# EAGLE board SparkFun_LTE_Stick_LARA_R6-Panel (EAGLE 9.6.2), part 1 of 4
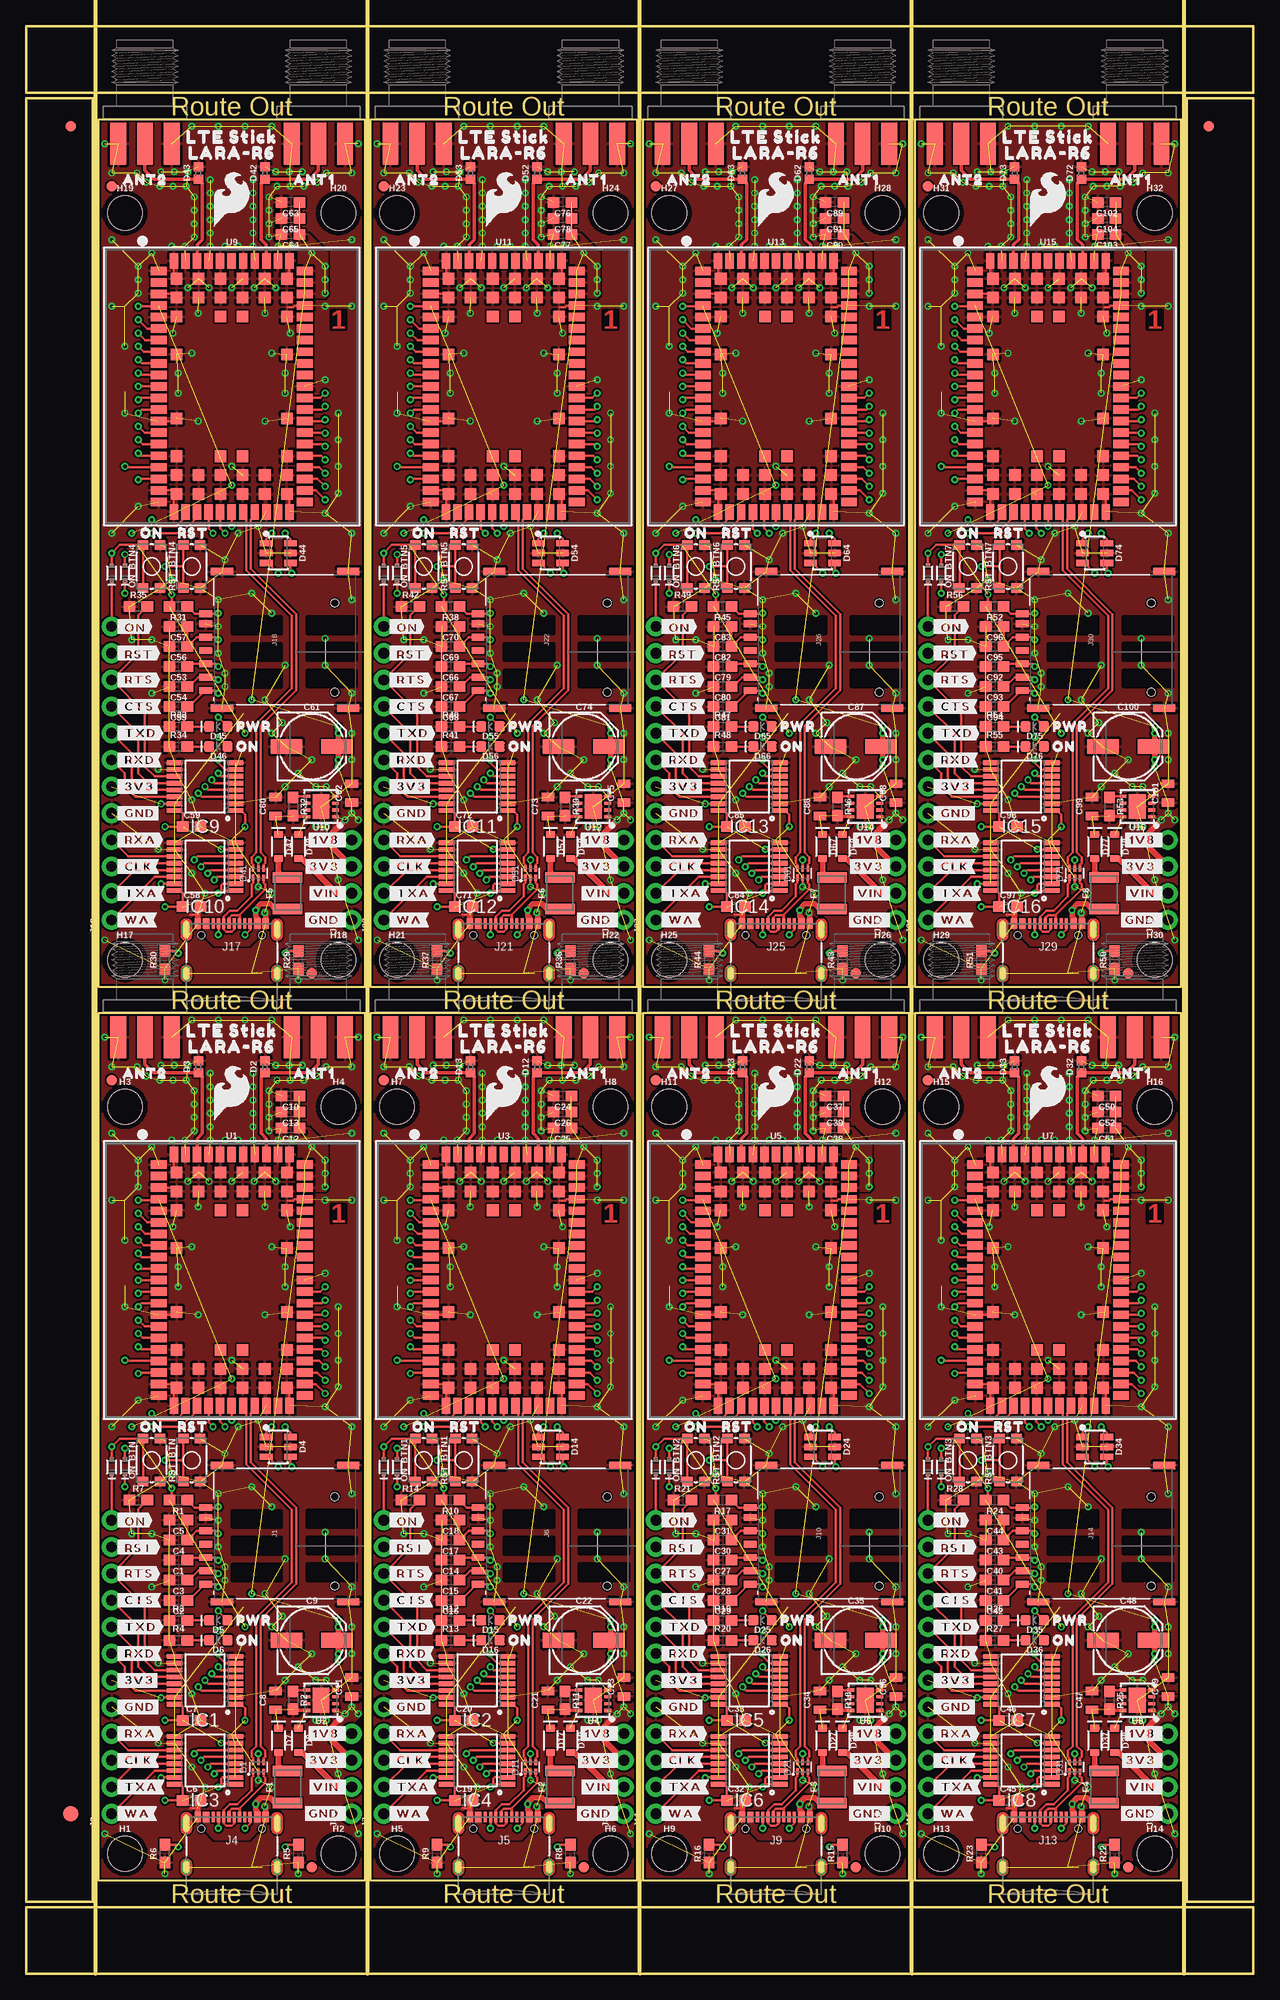
[diagram p0: board, top side]
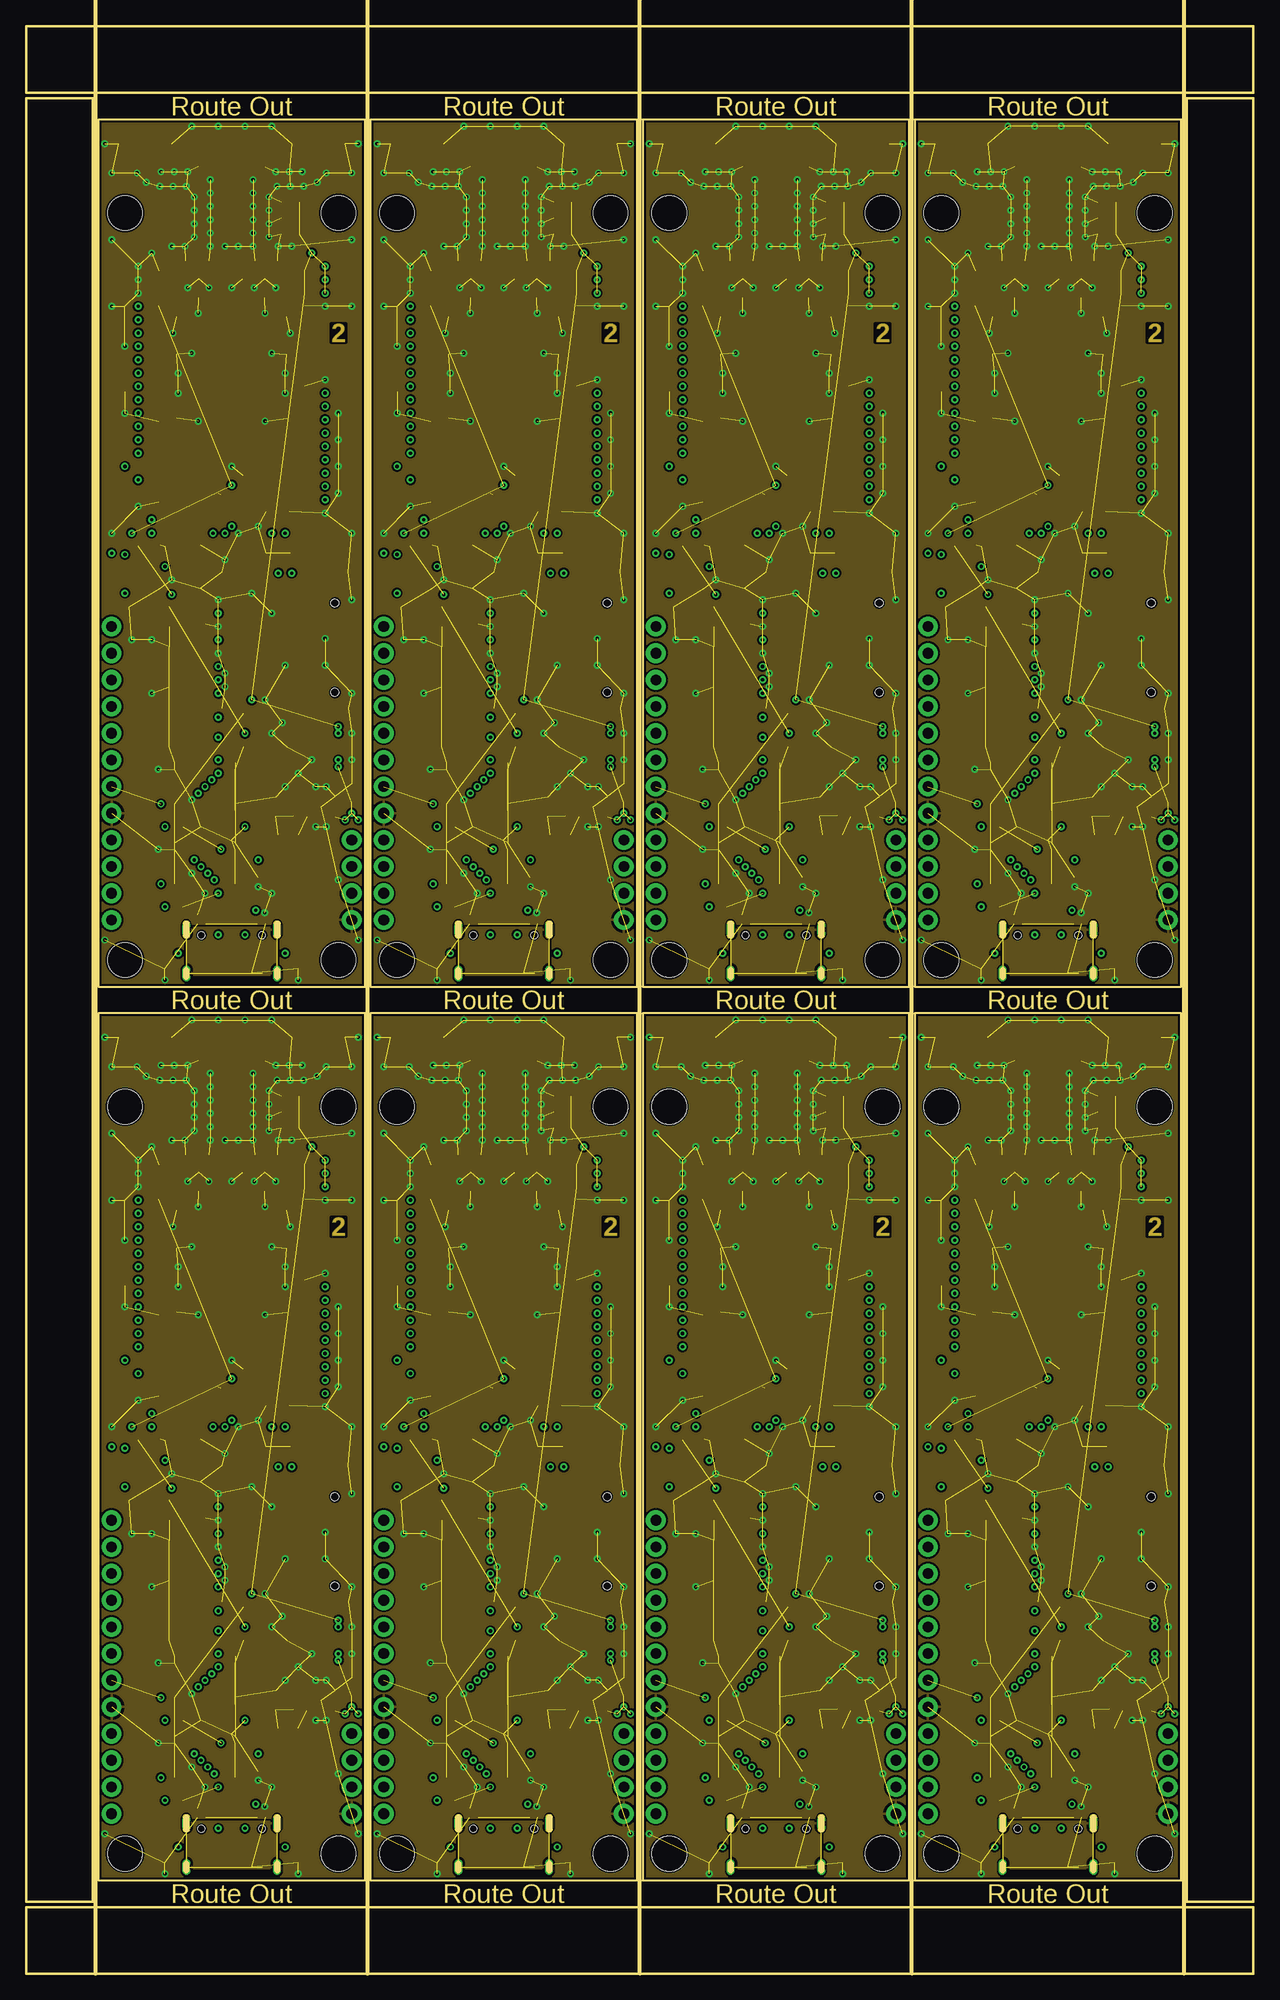
[diagram p1: board, inner layer Route2]
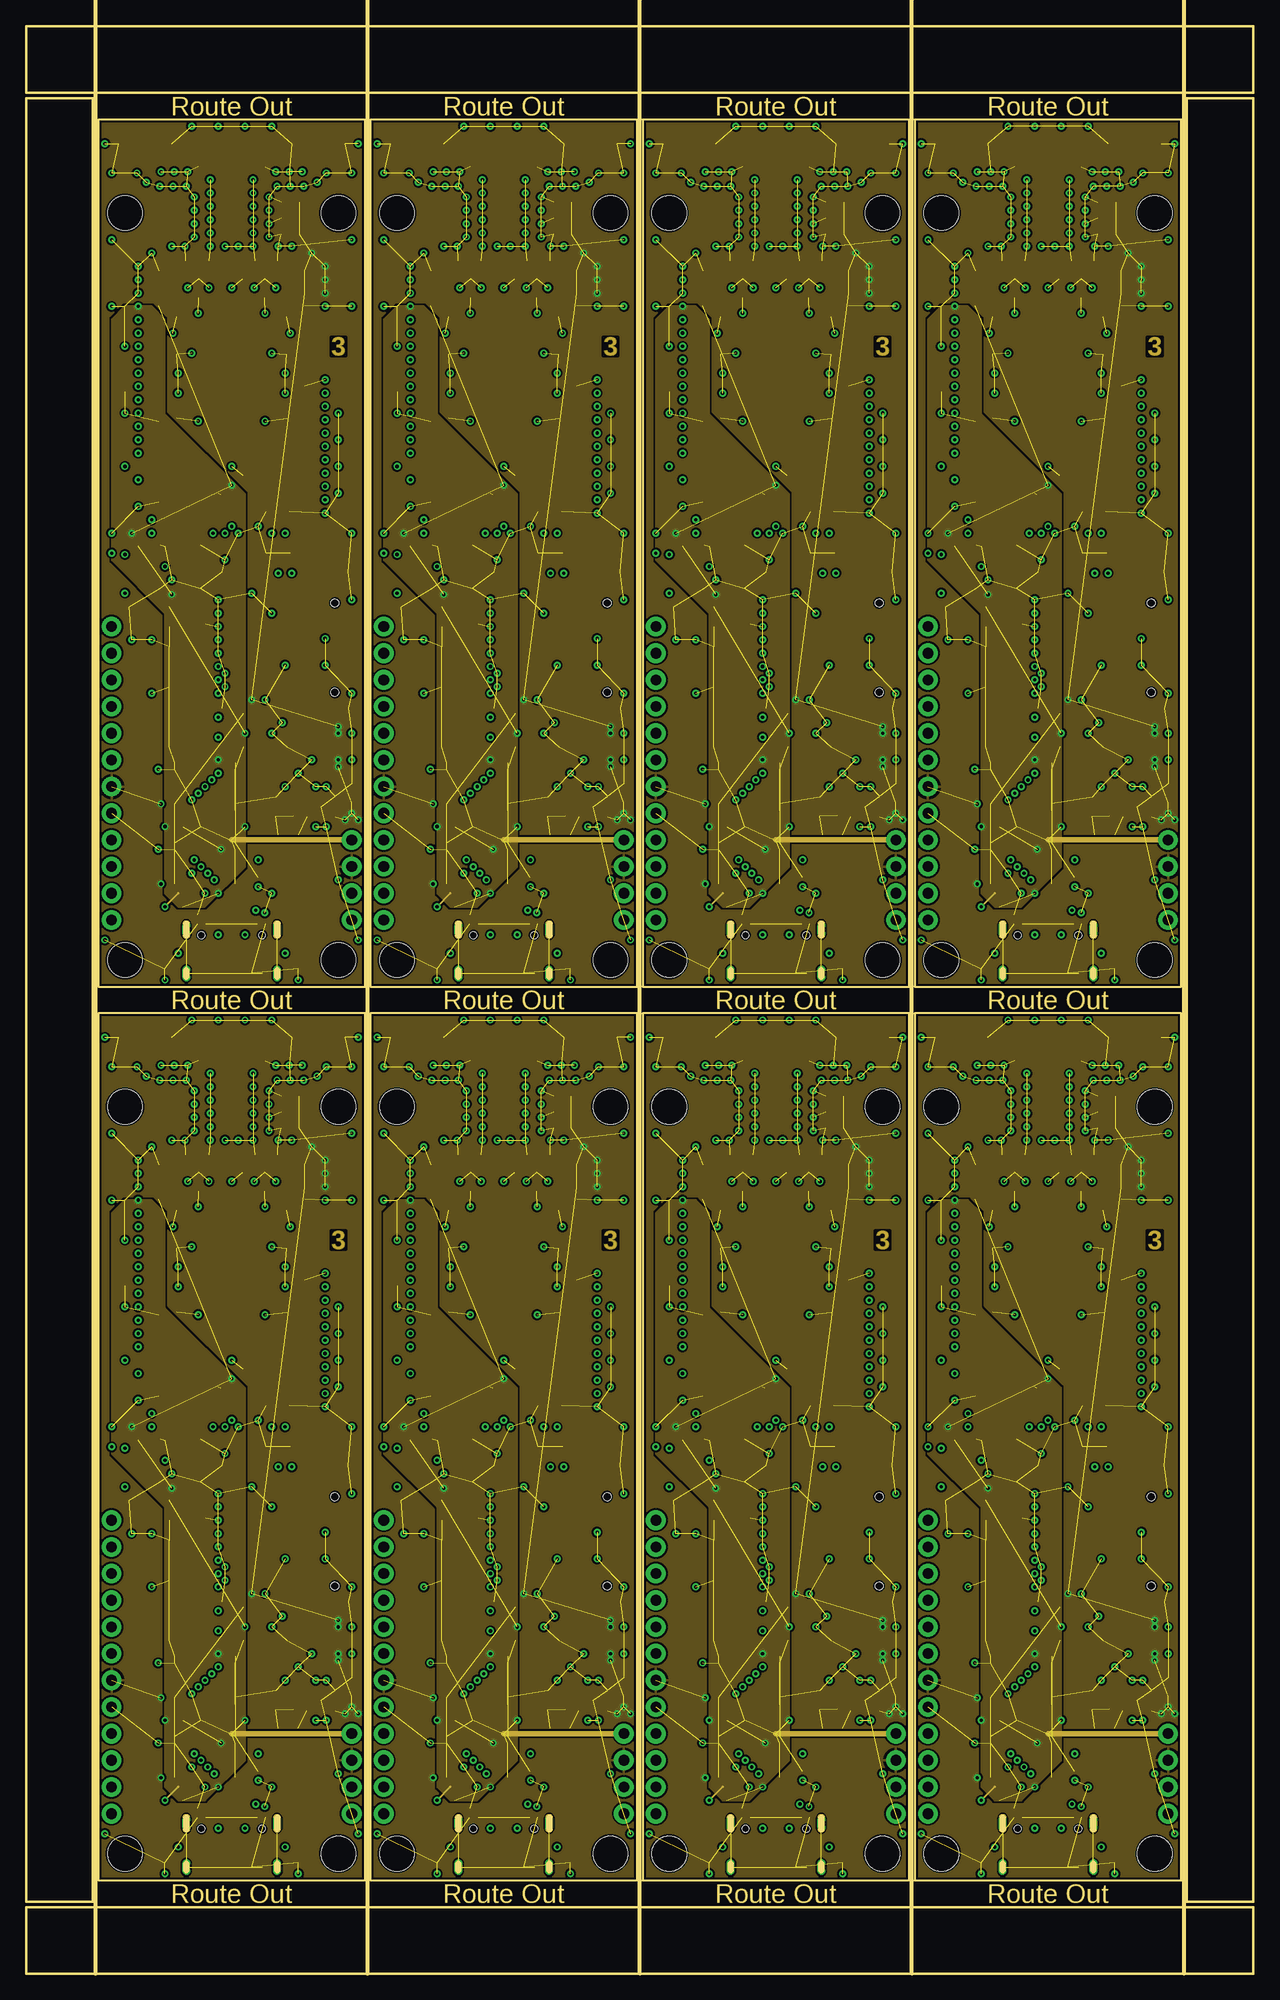
[diagram p2: board, inner layer Route15]
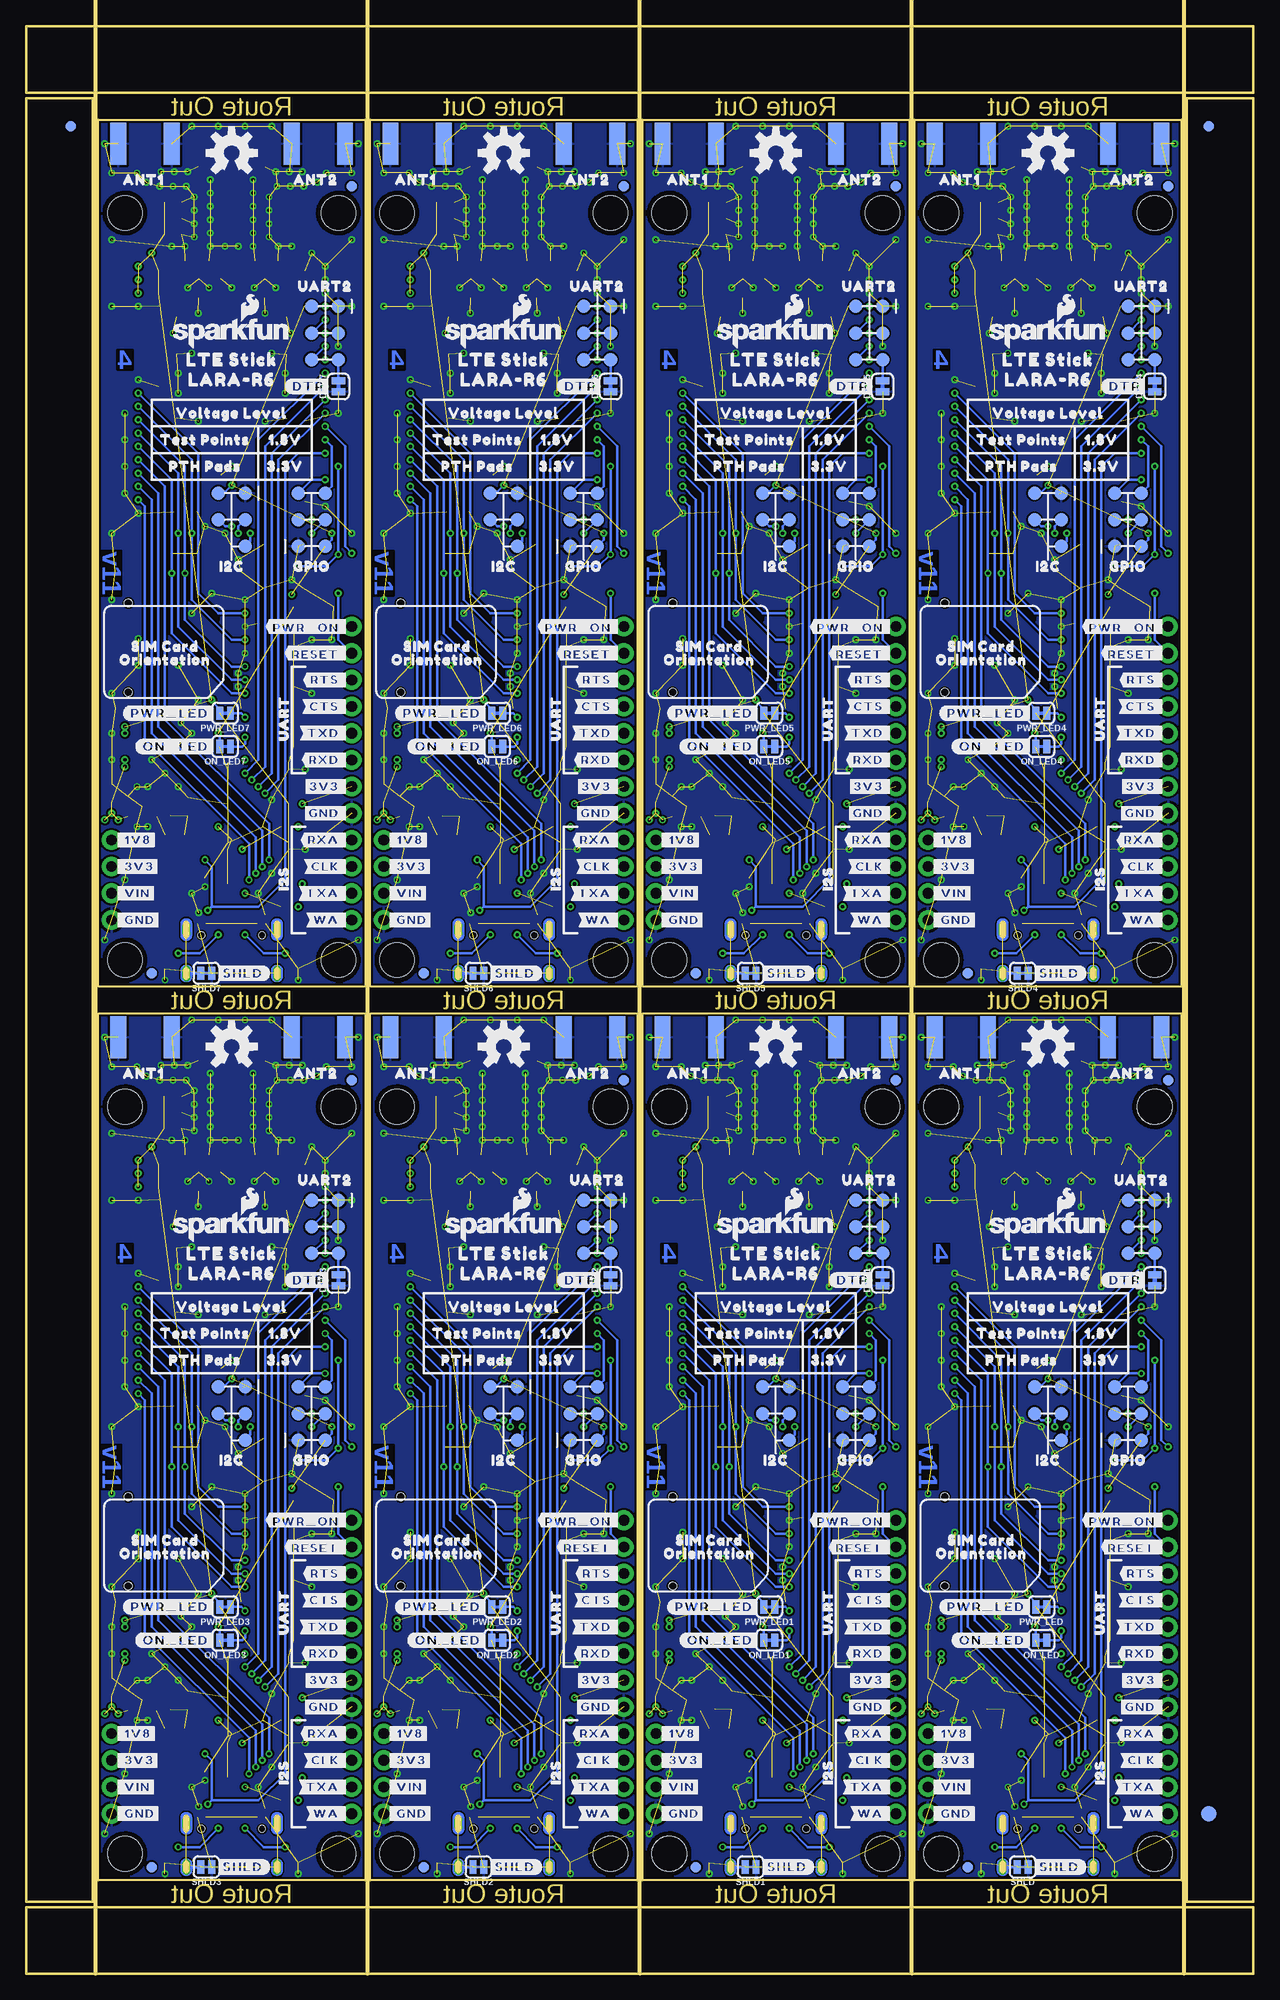
[diagram p3: board, bottom side, seen from below]

Size 116.84 x 185.42 mm. Coordinates in mm from the lower left corner, seen from the top.
Outline: 6.86,8.89 32.26,8.89 32.26,91.44 6.86,91.44 6.86,8.89
Outline: 32.77,8.89 58.17,8.89 58.17,91.44 32.77,91.44 32.77,8.89
Outline: 58.67,8.89 84.07,8.89 84.07,91.44 58.67,91.44 58.67,8.89
Outline: 84.58,8.89 109.98,8.89 109.98,91.44 84.58,91.44 84.58,8.89
Outline: 6.86,93.98 32.26,93.98 32.26,176.53 6.86,176.53 6.86,93.98
Outline: 32.77,93.98 58.17,93.98 58.17,176.53 32.77,176.53 32.77,93.98
Outline: 58.67,93.98 84.07,93.98 84.07,176.53 58.67,176.53 58.67,93.98
Outline: 84.58,93.98 109.98,93.98 109.98,176.53 84.58,176.53 84.58,93.98
Outline: 0,6.35 116.84,6.35 116.84,0 0,0 0,6.35
Outline: 110.49,178.56 116.84,178.56 116.84,6.86 110.49,6.86 110.49,178.56
Outline: 0,185.42 116.84,185.42 116.84,179.07 0,179.07 0,185.42
Outline: 0,178.56 6.35,178.56 6.35,6.86 0,6.86 0,178.56
Copper layers (1+2*15+16): Top 0.035559375mm / dielectric 0.47751875mm / Route2 0.035559375mm / dielectric 0.47751875mm / Route15 0.035559375mm / dielectric 0.47751875mm / Bottom 0.035559375mm
Design rules "SparkFun_LTE_Stick_LARA_R6": minimum track width 7mil, minimum drill 12mil, track to track 7mil, track to pad 7mil, pad to pad 7mil, via to via 7mil, smd to smd 7mil, copper to edge 7mil, drill to drill 7mil, minimum pad ring 7mil, minimum via ring 7mil, stop-mask expansion 3mil, vias tented up to drill 25mil, thermal gap 10mil
Net classes: 1 USB: width 0.239 mm, clearance 0.178 mm; 2 RF: width 0.312 mm, clearance 0.178 mm to class 0
tRestrict: area 14,32.5 to 14.1,32.9; area 14,22.2 to 14.4,22.4; area 14,29.8 to 14.4,30; area 39.9,32.5 to 40,32.9; area 39.9,22.2 to 40.3,22.4; area 39.9,29.8 to 40.3,30; area 65.8,32.5 to 65.9,32.9; area 65.8,22.2 to 66.2,22.4; area 65.8,29.8 to 66.2,30; area 91.7,32.5 to 91.8,32.9; area 91.7,22.2 to 92.1,22.4; area 91.7,29.8 to 92.1,30; 12 more areas
bRestrict: area 19.6,37.3 to 19.7,37.6; area 19.6,38.6 to 19.7,38.9; area 20.8,43.8 to 21,44.1; area 45.5,37.3 to 45.6,37.6; area 45.5,38.6 to 45.6,38.9; area 46.7,43.8 to 46.9,44.1; area 71.4,37.3 to 71.5,37.6; area 71.4,38.6 to 71.5,38.9; area 72.6,43.8 to 72.8,44.1; area 97.3,37.3 to 97.4,37.6; area 97.3,38.6 to 97.4,38.9; area 98.6,43.8 to 98.7,44.1; 12 more areas
Milling: 5 lines

## Footprints (pad centres in the part's own frame; a part is rotated, then mirrored left to right if it is on the bottom)
0603 = smd 1.1 x 1: 1 -0.85,0; 2 0.85,0
0805 = smd 0.8 x 1.2: 1 -0.9,0; 2 0.9,0
PANASONIC_D = smd 3 x 1.4: + 2.4,0; - -2.4,0
SOT886 = smd 0.61 x 0.25: 1 -0.405,0.5 | smd 0.56 x 0.25: 2 -0.43,0; 3 -0.43,-0.5; 4 0.43,-0.5; 5 0.43,0; 6 0.43,0.5
0402 = smd 0.85 x 0.9: 1 -0.58,0; 2 0.58,0
SOT23-6L = smd 0.6 x 1.2: 1 -0.95,-1.15; 2 0,-1.15; 3 0.95,-1.15; 4 0.95,1.15; 5 0,1.15; 6 -0.95,1.15
LED-0603 = smd 1 x 1: A -0.877,0; C 0.877,0
SOD-323 = smd 0.63 x 0.83: A 1.15,0; C -1.15,0
SOD-523 = smd 0.4 x 0.4: A -0.7,0; C 0.7,0
SMT-JUMPER_2_NC_TRACE_SILK = smd 0.66 x 1.27: 1 -0.521,0; 2 0.521,0
SMA-EDGE = smd 1.5 x 4: GND@0 -2.54,0; GND@1 2.54,0; SIG 0,0 | smd 1.5 x 4 bottom: GND@2 -2.54,0; GND@3 2.54,0
FIDUCIAL-1X2 = smd 1 x 1: 1 0,0
FIDUCIAL-1.5X3 = smd 1.5 x 1.5: 1 0,0
1210 = smd 1 x 2.8: 1 -1.5,0; 2 1.5,0
STAND-OFF = hole 3.302: 0,0
SOP65P640X120-16N = smd 1.5 x 0.45: 1 -2.9,2.275; 2 -2.9,1.625; 3 -2.9,0.975; 4 -2.9,0.325; 5 -2.9,-0.325; 6 -2.9,-0.975; 7 -2.9,-1.625; 8 -2.9,-2.275; 9 2.9,-2.275; 10 2.9,-1.625; 11 2.9,-0.975; 12 2.9,-0.325; 13 2.9,0.325; 14 2.9,0.975; 15 2.9,1.625; 16 2.9,2.275
NANO_SIM_PP = smd 0.7 x 2.1: A1 6.495,6; A2 -6.495,6; A3 -6.495,-6; A4 6.495,-6 | smd 0.65 x 1.23: C1 0.255,7.535; C2 -2.285,7.535; C3 -4.825,7.535; C5 1.525,7.535; C6 -1.015,7.535; C7 -3.555,7.535; CD 2.475,7.535 | hole 0.75: 3.505,-4.75; -4.995,-4.75
1X12_NO_SILK = drill 1.016 pad 1.88: 1 0,0; 2 2.54,0; 3 5.08,0; 4 7.62,0; 5 10.16,0; 6 12.7,0; 7 15.24,0; 8 17.78,0; 9 20.32,0; 10 22.86,0; 11 25.4,0; 12 27.94,0
1X04_NO_SILK = drill 1.016 pad 1.88: 1 0,0; 2 2.54,0; 3 5.08,0; 4 7.62,0
USB-C-16P_4LAYER-PADS = smd 0.3 x 1: A5 -1.25,-0.34; A6 -0.25,-0.34; A7 0.25,-0.34; A8 1.25,-0.34; B5 1.75,-0.34; B6 0.75,-0.34; B7 -0.75,-0.34; B8 -1.75,-0.34 | smd 0.6 x 1: GND -3.225,-0.34; GND2 3.225,-0.34; VBUS1 -2.45,-0.34; VBUS2 2.45,-0.34 | drill 0.4 pad 0.6 long: SHLD1 -4.318,-0.915; SHLD2 4.318,-0.915; SHLD3 -4.318,-5.095; SHLD4 4.318,-5.095 | hole 0.65: -2.89,-1.445; 2.89,-1.445
TACTILE_SWITCH_SMD_4.6X2.8MM = smd 0.9 x 1: 1 -2.05,-0.8; 2 2.05,-0.8; 3 2.05,0.8; 4 -2.05,0.8
PAD.03X.05 = smd 1.27 x 1.27: 1 0,0
LARA-LGA = smd 0.8 x 1.5: 1 -11,-6.95; 2 -9.9,-6.95; 3 -8.8,-6.95; 4 -7.7,-6.95; 5 -6.6,-6.95; 6 -5.5,-6.95; 7 -4.4,-6.95; 8 -3.3,-6.95; 9 -2.2,-6.95; 10 -1.1,-6.95; 11 0,-6.95; 12 1.1,-6.95; 13 2.2,-6.95; 14 3.3,-6.95; 15 4.4,-6.95; 16 5.5,-6.95; 17 6.6,-6.95; 18 7.7,-6.95; 19 8.8,-6.95; 20 9.9,-6.95; 21 11,-6.95; 33 11,6.95; 34 9.9,6.95; 35 8.8,6.95; 36 7.7,6.95; 37 6.6,6.95; 38 5.5,6.95; 39 4.4,6.95; 40 3.3,6.95; 41 2.2,6.95; 42 1.1,6.95; 43 0,6.95; 44 -1.1,6.95; 45 -2.2,6.95; 46 -3.3,6.95; 47 -4.4,6.95; 48 -5.5,6.95; 49 -6.6,6.95; 50 -7.7,6.95; 51 -8.8,6.95; 52 -9.9,6.95; 53 -11,6.95 | smd 1.5 x 0.8: 22 11.95,-5.5; 23 11.95,-4.4; 24 11.95,-3.3; 25 11.95,-2.2; 26 11.95,-1.1; 27 11.95,0; 28 11.95,1.1; 29 11.95,2.2; 30 11.95,3.3; 31 11.95,4.4; 32 11.95,5.5; 54 -11.95,5.5; 55 -11.95,4.4; 56 -11.95,3.3; 57 -11.95,2.2; 58 -11.95,1.1; 59 -11.95,0; 60 -11.95,-1.1; 61 -11.95,-2.2; 62 -11.95,-3.3; 63 -11.95,-4.4; 64 -11.95,-5.5 | smd 1.1 x 1.1: 65 -10.25,-5.25; 66 -10.25,-3.15; 67 -10.25,-1.05; 68 -10.25,1.05; 69 -10.25,3.15; 70 -10.25,5.25; 71 -8.45,-5.25; 72 -8.45,-3.15; 73 -8.45,-1.05; 74 -8.45,1.05; 75 -8.45,3.15; 76 -8.45,5.25; 77 -6.65,-5.25; 78 -6.65,5.25; 79 -3.05,-5.25; 80 -3.05,5.25; 81 3.05,-5.25; 82 3.05,5.25; 83 6.65,-5.25; 84 6.65,5.25; 85 8.45,-5.25; 86 8.45,-3.15; 87 8.45,-1.05; 88 8.45,1.05; 89 8.45,3.15; 90 8.45,5.25; 91 10.25,-5.25; 92 10.25,-3.15; 93 10.25,-1.05; 94 10.25,1.05; 95 10.25,3.15; 96 10.25,5.25; 97 -6.65,-1.05; 98 -6.65,1.05; 99 6.65,-1.05; 100 6.65,1.05
UDFN-8 = smd 0.3 x 0.65: 1 -0.975,-1.375; 2 -0.325,-1.375; 3 0.325,-1.375; 4 0.975,-1.375; 5 0.975,1.375; 6 0.325,1.375; 7 -0.325,1.375; 8 -0.975,1.375 | smd 2.35 x 1.6: EP 0,0

## Placement (x,y rotation side)
C1  47pF  [0603]  14.48,39.37 180 top
C2  47pF  [0603]  14.48,35.56 180 top
C3  47pF  [0603]  14.48,37.47 180 top
C4  47pF  [0603]  14.48,41.27 180 top
C5  0.1uF  [0603]  14.48,43.18 180 top
C6  0.1uF  [0603]  15.75,16.51 0 top
C7  0.1uF  [0603]  15.75,24.13 0 top
C8  10uF  [0805]  23.75,26.04 90 top
C9  100uF  [PANASONIC_D]  27.18,31.75 0 top
C10  0.1uF  [0603]  25.15,83.57 180 top
C11  10uF  [0805]  30.99,27.3 90 top
C12  15pF  [0603]  25.15,80.52 180 top
C13  68pF  [0603]  25.15,82.04 180 top
C14  47pF  [0603]  40.39,39.37 180 top
C15  47pF  [0603]  40.39,37.47 180 top
C16  47pF  [0603]  40.39,35.56 180 top
C17  47pF  [0603]  40.39,41.27 180 top
C18  0.1uF  [0603]  40.39,43.18 180 top
C19  0.1uF  [0603]  41.66,16.51 0 top
C20  0.1uF  [0603]  41.66,24.13 0 top
C21  10uF  [0805]  49.66,26.04 90 top
C22  100uF  [PANASONIC_D]  53.09,31.75 0 top
C23  10uF  [0805]  56.9,27.3 90 top
C24  0.1uF  [0603]  51.05,83.57 180 top
C25  15pF  [0603]  51.05,80.52 180 top
C26  68pF  [0603]  51.05,82.04 180 top
C27  47pF  [0603]  66.29,39.37 180 top
C28  47pF  [0603]  66.29,37.47 180 top
C29  47pF  [0603]  66.29,35.56 180 top
C30  47pF  [0603]  66.29,41.27 180 top
C31  0.1uF  [0603]  66.29,43.18 180 top
C32  0.1uF  [0603]  67.56,16.51 0 top
C33  0.1uF  [0603]  67.56,24.13 0 top
C34  10uF  [0805]  75.56,26.04 90 top
C35  100uF  [PANASONIC_D]  78.99,31.75 0 top
C36  10uF  [0805]  82.8,27.3 90 top
C37  0.1uF  [0603]  76.96,83.57 180 top
C38  15pF  [0603]  76.96,80.52 180 top
C39  68pF  [0603]  76.96,82.04 180 top
C40  47pF  [0603]  92.2,39.37 180 top
C41  47pF  [0603]  92.2,37.47 180 top
C42  47pF  [0603]  92.2,35.56 180 top
C43  47pF  [0603]  92.2,41.27 180 top
C44  0.1uF  [0603]  92.2,43.18 180 top
C45  0.1uF  [0603]  93.47,16.51 0 top
C46  0.1uF  [0603]  93.47,24.13 0 top
C47  10uF  [0805]  101.47,26.04 90 top
C48  100uF  [PANASONIC_D]  104.9,31.75 0 top
C49  10uF  [0805]  108.71,27.3 90 top
C50  0.1uF  [0603]  102.87,83.57 180 top
C51  15pF  [0603]  102.87,80.52 180 top
C52  68pF  [0603]  102.87,82.04 180 top
C53  47pF  [0603]  14.48,124.46 180 top
C54  47pF  [0603]  14.48,122.56 180 top
C55  47pF  [0603]  14.48,120.65 180 top
C56  47pF  [0603]  14.48,126.36 180 top
C57  0.1uF  [0603]  14.48,128.27 180 top
C58  0.1uF  [0603]  15.75,101.6 0 top
C59  0.1uF  [0603]  15.75,109.22 0 top
C60  10uF  [0805]  23.75,111.12 90 top
C61  100uF  [PANASONIC_D]  27.18,116.84 0 top
C62  10uF  [0805]  30.99,112.39 90 top
C63  0.1uF  [0603]  25.15,168.66 180 top
C64  15pF  [0603]  25.15,165.61 180 top
C65  68pF  [0603]  25.15,167.13 180 top
C66  47pF  [0603]  40.39,124.46 180 top
C67  47pF  [0603]  40.39,122.56 180 top
C68  47pF  [0603]  40.39,120.65 180 top
C69  47pF  [0603]  40.39,126.36 180 top
C70  0.1uF  [0603]  40.39,128.27 180 top
C71  0.1uF  [0603]  41.66,101.6 0 top
C72  0.1uF  [0603]  41.66,109.22 0 top
C73  10uF  [0805]  49.66,111.12 90 top
C74  100uF  [PANASONIC_D]  53.09,116.84 0 top
C75  10uF  [0805]  56.9,112.39 90 top
C76  0.1uF  [0603]  51.05,168.66 180 top
C77  15pF  [0603]  51.05,165.61 180 top
C78  68pF  [0603]  51.05,167.13 180 top
C79  47pF  [0603]  66.29,124.46 180 top
C80  47pF  [0603]  66.29,122.56 180 top
C81  47pF  [0603]  66.29,120.65 180 top
C82  47pF  [0603]  66.29,126.36 180 top
C83  0.1uF  [0603]  66.29,128.27 180 top
C84  0.1uF  [0603]  67.56,101.6 0 top
C85  0.1uF  [0603]  67.56,109.22 0 top
C86  10uF  [0805]  75.56,111.12 90 top
C87  100uF  [PANASONIC_D]  78.99,116.84 0 top
C88  10uF  [0805]  82.8,112.39 90 top
C89  0.1uF  [0603]  76.96,168.66 180 top
C90  15pF  [0603]  76.96,165.61 180 top
C91  68pF  [0603]  76.96,167.13 180 top
C92  47pF  [0603]  92.2,124.46 180 top
C93  47pF  [0603]  92.2,122.56 180 top
C94  47pF  [0603]  92.2,120.65 180 top
C95  47pF  [0603]  92.2,126.36 180 top
C96  0.1uF  [0603]  92.2,128.27 180 top
C97  0.1uF  [0603]  93.47,101.6 0 top
C98  0.1uF  [0603]  93.47,109.22 0 top
C99  10uF  [0805]  101.47,111.12 90 top
C100  100uF  [PANASONIC_D]  104.9,116.84 0 top
C101  10uF  [0805]  108.71,112.39 90 top
C102  0.1uF  [0603]  102.87,168.66 180 top
C103  15pF  [0603]  102.87,165.61 180 top
C104  68pF  [0603]  102.87,167.13 180 top
D1  PRTR5V0U2F  [SOT886]  22.1,19.69 90 top
D2  PESD0402-0402  [0402]  22.73,86.36 90 top
D3  PESD0402-0402  [0402]  16.38,86.36 90 top
D4  DT1042-04SO-7  [SOT23-6L]  24,50.16 270 top
D5  Red  [LED-0603]  18.29,33.66 180 top
D6  Red  [LED-0603]  18.29,31.75 180 top
D7  3A/10V/280mV  [SOD-323]  24,22.23 270 top
D8  3A/10V/280mV  [SOD-323]  25.91,22.23 270 top
D9  120mA/40V/370mV  [SOD-523]  8.13,48.26 270 top
D10  120mA/40V/370mV  [SOD-523]  9.4,48.26 270 top
D11  PRTR5V0U2F  [SOT886]  48.01,19.69 90 top
D12  PESD0402-0402  [0402]  48.64,86.36 90 top
D13  PESD0402-0402  [0402]  42.29,86.36 90 top
D14  DT1042-04SO-7  [SOT23-6L]  49.91,50.16 270 top
D15  Red  [LED-0603]  44.2,33.66 180 top
D16  Red  [LED-0603]  44.2,31.75 180 top
D17  3A/10V/280mV  [SOD-323]  49.91,22.23 270 top
D18  3A/10V/280mV  [SOD-323]  51.82,22.23 270 top
D19  120mA/40V/370mV  [SOD-523]  34.04,48.26 270 top
D20  120mA/40V/370mV  [SOD-523]  35.31,48.26 270 top
D21  PRTR5V0U2F  [SOT886]  73.91,19.69 90 top
D22  PESD0402-0402  [0402]  74.55,86.36 90 top
D23  PESD0402-0402  [0402]  68.2,86.36 90 top
D24  DT1042-04SO-7  [SOT23-6L]  75.82,50.16 270 top
D25  Red  [LED-0603]  70.1,33.66 180 top
D26  Red  [LED-0603]  70.1,31.75 180 top
D27  3A/10V/280mV  [SOD-323]  75.82,22.23 270 top
D28  3A/10V/280mV  [SOD-323]  77.72,22.23 270 top
D29  120mA/40V/370mV  [SOD-523]  59.94,48.26 270 top
D30  120mA/40V/370mV  [SOD-523]  61.21,48.26 270 top
D31  PRTR5V0U2F  [SOT886]  99.82,19.69 90 top
D32  PESD0402-0402  [0402]  100.46,86.36 90 top
D33  PESD0402-0402  [0402]  94.11,86.36 90 top
D34  DT1042-04SO-7  [SOT23-6L]  101.73,50.16 270 top
D35  Red  [LED-0603]  96.01,33.66 180 top
D36  Red  [LED-0603]  96.01,31.75 180 top
D37  3A/10V/280mV  [SOD-323]  101.73,22.23 270 top
D38  3A/10V/280mV  [SOD-323]  103.63,22.23 270 top
D39  120mA/40V/370mV  [SOD-523]  85.85,48.26 270 top
D40  120mA/40V/370mV  [SOD-523]  87.12,48.26 270 top
D41  PRTR5V0U2F  [SOT886]  22.1,104.78 90 top
D42  PESD0402-0402  [0402]  22.73,171.45 90 top
D43  PESD0402-0402  [0402]  16.38,171.45 90 top
D44  DT1042-04SO-7  [SOT23-6L]  24,135.25 270 top
D45  Red  [LED-0603]  18.29,118.75 180 top
D46  Red  [LED-0603]  18.29,116.84 180 top
D47  3A/10V/280mV  [SOD-323]  24,107.31 270 top
D48  3A/10V/280mV  [SOD-323]  25.91,107.31 270 top
D49  120mA/40V/370mV  [SOD-523]  8.13,133.35 270 top
D50  120mA/40V/370mV  [SOD-523]  9.4,133.35 270 top
D51  PRTR5V0U2F  [SOT886]  48.01,104.78 90 top
D52  PESD0402-0402  [0402]  48.64,171.45 90 top
D53  PESD0402-0402  [0402]  42.29,171.45 90 top
D54  DT1042-04SO-7  [SOT23-6L]  49.91,135.25 270 top
D55  Red  [LED-0603]  44.2,118.75 180 top
D56  Red  [LED-0603]  44.2,116.84 180 top
D57  3A/10V/280mV  [SOD-323]  49.91,107.31 270 top
D58  3A/10V/280mV  [SOD-323]  51.82,107.31 270 top
D59  120mA/40V/370mV  [SOD-523]  34.04,133.35 270 top
D60  120mA/40V/370mV  [SOD-523]  35.31,133.35 270 top
D61  PRTR5V0U2F  [SOT886]  73.91,104.78 90 top
D62  PESD0402-0402  [0402]  74.55,171.45 90 top
D63  PESD0402-0402  [0402]  68.2,171.45 90 top
D64  DT1042-04SO-7  [SOT23-6L]  75.82,135.25 270 top
D65  Red  [LED-0603]  70.1,118.75 180 top
D66  Red  [LED-0603]  70.1,116.84 180 top
D67  3A/10V/280mV  [SOD-323]  75.82,107.31 270 top
D68  3A/10V/280mV  [SOD-323]  77.72,107.31 270 top
D69  120mA/40V/370mV  [SOD-523]  59.94,133.35 270 top
D70  120mA/40V/370mV  [SOD-523]  61.21,133.35 270 top
D71  PRTR5V0U2F  [SOT886]  99.82,104.78 90 top
D72  PESD0402-0402  [0402]  100.46,171.45 90 top
D73  PESD0402-0402  [0402]  94.11,171.45 90 top
D74  DT1042-04SO-7  [SOT23-6L]  101.73,135.25 270 top
D75  Red  [LED-0603]  96.01,118.75 180 top
D76  Red  [LED-0603]  96.01,116.84 180 top
D77  3A/10V/280mV  [SOD-323]  101.73,107.31 270 top
D78  3A/10V/280mV  [SOD-323]  103.63,107.31 270 top
D79  120mA/40V/370mV  [SOD-523]  85.85,133.35 270 top
D80  120mA/40V/370mV  [SOD-523]  87.12,133.35 270 top
DTR  JUMPER-SMT_2_NC_TRACE_SILK  [SMT-JUMPER_2_NC_TRACE_SILK]  9.4,66.04 90 bottom
DTR1  JUMPER-SMT_2_NC_TRACE_SILK  [SMT-JUMPER_2_NC_TRACE_SILK]  35.31,66.04 90 bottom
DTR2  JUMPER-SMT_2_NC_TRACE_SILK  [SMT-JUMPER_2_NC_TRACE_SILK]  61.21,66.04 90 bottom
DTR3  JUMPER-SMT_2_NC_TRACE_SILK  [SMT-JUMPER_2_NC_TRACE_SILK]  87.12,66.04 90 bottom
DTR4  JUMPER-SMT_2_NC_TRACE_SILK  [SMT-JUMPER_2_NC_TRACE_SILK]  9.4,151.13 90 bottom
DTR5  JUMPER-SMT_2_NC_TRACE_SILK  [SMT-JUMPER_2_NC_TRACE_SILK]  35.31,151.13 90 bottom
DTR6  JUMPER-SMT_2_NC_TRACE_SILK  [SMT-JUMPER_2_NC_TRACE_SILK]  61.21,151.13 90 bottom
DTR7  JUMPER-SMT_2_NC_TRACE_SILK  [SMT-JUMPER_2_NC_TRACE_SILK]  87.12,151.13 90 bottom
E1  ANTENNA-SMA-GROUNDEDEDGE_SMA  [SMA-EDGE]  11.3,89.15 0 top
E2  ANTENNA-SMA-GROUNDEDEDGE_SMA  [SMA-EDGE]  27.81,89.15 0 top
E3  ANTENNA-SMA-GROUNDEDEDGE_SMA  [SMA-EDGE]  37.21,89.15 0 top
E4  ANTENNA-SMA-GROUNDEDEDGE_SMA  [SMA-EDGE]  53.72,89.15 0 top
E5  ANTENNA-SMA-GROUNDEDEDGE_SMA  [SMA-EDGE]  63.12,89.15 0 top
E6  ANTENNA-SMA-GROUNDEDEDGE_SMA  [SMA-EDGE]  79.63,89.15 0 top
E7  ANTENNA-SMA-GROUNDEDEDGE_SMA  [SMA-EDGE]  89.03,89.15 0 top
E8  ANTENNA-SMA-GROUNDEDEDGE_SMA  [SMA-EDGE]  105.54,89.15 0 top
E9  ANTENNA-SMA-GROUNDEDEDGE_SMA  [SMA-EDGE]  11.3,174.24 0 top
E10  ANTENNA-SMA-GROUNDEDEDGE_SMA  [SMA-EDGE]  27.81,174.24 0 top
E11  ANTENNA-SMA-GROUNDEDEDGE_SMA  [SMA-EDGE]  37.21,174.24 0 top
E12  ANTENNA-SMA-GROUNDEDEDGE_SMA  [SMA-EDGE]  53.72,174.24 0 top
E13  ANTENNA-SMA-GROUNDEDEDGE_SMA  [SMA-EDGE]  63.12,174.24 0 top
E14  ANTENNA-SMA-GROUNDEDEDGE_SMA  [SMA-EDGE]  79.63,174.24 0 top
E15  ANTENNA-SMA-GROUNDEDEDGE_SMA  [SMA-EDGE]  89.03,174.24 0 top
E16  ANTENNA-SMA-GROUNDEDEDGE_SMA  [SMA-EDGE]  105.54,174.24 0 top
E$1  [FIDUCIAL-1X2]  4.23,175.89 0 top
E$2  [FIDUCIAL-1X2]  4.23,175.89 0 bottom
E$3  [FIDUCIAL-1X2]  112.61,175.89 0 top
E$4  [FIDUCIAL-1X2]  112.61,175.89 0 bottom
E$5  [FIDUCIAL-1.5X3]  4.23,15.24 0 top
E$6  [FIDUCIAL-1.5X3]  4.23,15.24 0 bottom
F1  6V/2A  [1210]  24.89,17.78 90 top
F2  6V/2A  [1210]  50.8,17.78 90 top
F3  6V/2A  [1210]  76.71,17.78 90 top
F4  6V/2A  [1210]  102.62,17.78 90 top
F5  6V/2A  [1210]  24.89,102.87 90 top
F6  6V/2A  [1210]  50.8,102.87 90 top
F7  6V/2A  [1210]  76.71,102.87 90 top
F8  6V/2A  [1210]  102.62,102.87 90 top
FD1  FIDUCIAL1X2  [FIDUCIAL-1X2]  8.13,85.09 0 top
FD2  FIDUCIAL1X2  [FIDUCIAL-1X2]  8.13,85.09 0 bottom
FD3  FIDUCIAL1X2  [FIDUCIAL-1X2]  27.18,10.16 0 top
FD4  FIDUCIAL1X2  [FIDUCIAL-1X2]  27.18,10.16 0 bottom
FD5  FIDUCIAL1X2  [FIDUCIAL-1X2]  34.04,85.09 0 top
FD6  FIDUCIAL1X2  [FIDUCIAL-1X2]  34.04,85.09 0 bottom
FD7  FIDUCIAL1X2  [FIDUCIAL-1X2]  53.09,10.16 0 top
FD8  FIDUCIAL1X2  [FIDUCIAL-1X2]  53.09,10.16 0 bottom
FD9  FIDUCIAL1X2  [FIDUCIAL-1X2]  59.94,85.09 0 top
FD10  FIDUCIAL1X2  [FIDUCIAL-1X2]  59.94,85.09 0 bottom
FD11  FIDUCIAL1X2  [FIDUCIAL-1X2]  78.99,10.16 0 top
FD12  FIDUCIAL1X2  [FIDUCIAL-1X2]  78.99,10.16 0 bottom
FD13  FIDUCIAL1X2  [FIDUCIAL-1X2]  85.85,85.09 0 top
FD14  FIDUCIAL1X2  [FIDUCIAL-1X2]  85.85,85.09 0 bottom
FD15  FIDUCIAL1X2  [FIDUCIAL-1X2]  104.9,10.16 0 top
FD16  FIDUCIAL1X2  [FIDUCIAL-1X2]  104.9,10.16 0 bottom
FD17  FIDUCIAL1X2  [FIDUCIAL-1X2]  8.13,170.18 0 top
FD18  FIDUCIAL1X2  [FIDUCIAL-1X2]  8.13,170.18 0 bottom
FD19  FIDUCIAL1X2  [FIDUCIAL-1X2]  27.18,95.25 0 top
FD20  FIDUCIAL1X2  [FIDUCIAL-1X2]  27.18,95.25 0 bottom
FD21  FIDUCIAL1X2  [FIDUCIAL-1X2]  34.04,170.18 0 top
FD22  FIDUCIAL1X2  [FIDUCIAL-1X2]  34.04,170.18 0 bottom
FD23  FIDUCIAL1X2  [FIDUCIAL-1X2]  53.09,95.25 0 top
FD24  FIDUCIAL1X2  [FIDUCIAL-1X2]  53.09,95.25 0 bottom
FD25  FIDUCIAL1X2  [FIDUCIAL-1X2]  59.94,170.18 0 top
FD26  FIDUCIAL1X2  [FIDUCIAL-1X2]  59.94,170.18 0 bottom
FD27  FIDUCIAL1X2  [FIDUCIAL-1X2]  78.99,95.25 0 top
FD28  FIDUCIAL1X2  [FIDUCIAL-1X2]  78.99,95.25 0 bottom
FD29  FIDUCIAL1X2  [FIDUCIAL-1X2]  85.85,170.18 0 top
FD30  FIDUCIAL1X2  [FIDUCIAL-1X2]  85.85,170.18 0 bottom
FD31  FIDUCIAL1X2  [FIDUCIAL-1X2]  104.9,95.25 0 top
FD32  FIDUCIAL1X2  [FIDUCIAL-1X2]  104.9,95.25 0 bottom
H1  STAND-OFF  [STAND-OFF]  9.4,11.43 0 top
H2  STAND-OFF  [STAND-OFF]  29.72,11.43 0 top
H3  STAND-OFF  [STAND-OFF]  9.4,82.55 0 top
H4  STAND-OFF  [STAND-OFF]  29.72,82.55 0 top
H5  STAND-OFF  [STAND-OFF]  35.31,11.43 0 top
H6  STAND-OFF  [STAND-OFF]  55.63,11.43 0 top
H7  STAND-OFF  [STAND-OFF]  35.31,82.55 0 top
H8  STAND-OFF  [STAND-OFF]  55.63,82.55 0 top
H9  STAND-OFF  [STAND-OFF]  61.21,11.43 0 top
H10  STAND-OFF  [STAND-OFF]  81.53,11.43 0 top
H11  STAND-OFF  [STAND-OFF]  61.21,82.55 0 top
H12  STAND-OFF  [STAND-OFF]  81.53,82.55 0 top
H13  STAND-OFF  [STAND-OFF]  87.12,11.43 0 top
H14  STAND-OFF  [STAND-OFF]  107.44,11.43 0 top
H15  STAND-OFF  [STAND-OFF]  87.12,82.55 0 top
H16  STAND-OFF  [STAND-OFF]  107.44,82.55 0 top
H17  STAND-OFF  [STAND-OFF]  9.4,96.52 0 top
H18  STAND-OFF  [STAND-OFF]  29.72,96.52 0 top
H19  STAND-OFF  [STAND-OFF]  9.4,167.64 0 top
H20  STAND-OFF  [STAND-OFF]  29.72,167.64 0 top
H21  STAND-OFF  [STAND-OFF]  35.31,96.52 0 top
H22  STAND-OFF  [STAND-OFF]  55.63,96.52 0 top
H23  STAND-OFF  [STAND-OFF]  35.31,167.64 0 top
H24  STAND-OFF  [STAND-OFF]  55.63,167.64 0 top
H25  STAND-OFF  [STAND-OFF]  61.21,96.52 0 top
H26  STAND-OFF  [STAND-OFF]  81.53,96.52 0 top
H27  STAND-OFF  [STAND-OFF]  61.21,167.64 0 top
H28  STAND-OFF  [STAND-OFF]  81.53,167.64 0 top
H29  STAND-OFF  [STAND-OFF]  87.12,96.52 0 top
H30  STAND-OFF  [STAND-OFF]  107.44,96.52 0 top
H31  STAND-OFF  [STAND-OFF]  87.12,167.64 0 top
H32  STAND-OFF  [STAND-OFF]  107.44,167.64 0 top
IC1  SN74AVC4T774PW  [SOP65P640X120-16N]  17.02,27.94 180 top
IC2  SN74AVC4T774PW  [SOP65P640X120-16N]  42.93,27.94 180 top
IC3  SN74AVC4T774PW  [SOP65P640X120-16N]  17.02,20.32 180 top
IC4  SN74AVC4T774PW  [SOP65P640X120-16N]  42.93,20.32 180 top
IC5  SN74AVC4T774PW  [SOP65P640X120-16N]  68.83,27.94 180 top
IC6  SN74AVC4T774PW  [SOP65P640X120-16N]  68.83,20.32 180 top
IC7  SN74AVC4T774PW  [SOP65P640X120-16N]  94.74,27.94 180 top
IC8  SN74AVC4T774PW  [SOP65P640X120-16N]  94.74,20.32 180 top
IC9  SN74AVC4T774PW  [SOP65P640X120-16N]  17.02,113.03 180 top
IC10  SN74AVC4T774PW  [SOP65P640X120-16N]  17.02,105.41 180 top
IC11  SN74AVC4T774PW  [SOP65P640X120-16N]  42.93,113.03 180 top
IC12  SN74AVC4T774PW  [SOP65P640X120-16N]  42.93,105.41 180 top
IC13  SN74AVC4T774PW  [SOP65P640X120-16N]  68.83,113.03 180 top
IC14  SN74AVC4T774PW  [SOP65P640X120-16N]  68.83,105.41 180 top
IC15  SN74AVC4T774PW  [SOP65P640X120-16N]  94.74,113.03 180 top
IC16  SN74AVC4T774PW  [SOP65P640X120-16N]  94.74,105.41 180 top
J1  NANO_SIM  [NANO_SIM_PP]  24.64,41.91 90 top
J2  [1X12_NO_SILK]  8.13,15.24 90 top
J3  [1X04_NO_SILK]  30.99,15.24 90 top
J4  [USB-C-16P_4LAYER-PADS]  19.56,15.24 0 top
J5  [USB-C-16P_4LAYER-PADS]  45.47,15.24 0 top
J6  NANO_SIM  [NANO_SIM_PP]  50.55,41.91 90 top
J7  [1X12_NO_SILK]  34.04,15.24 90 top
J8  [1X04_NO_SILK]  56.9,15.24 90 top
J9  [USB-C-16P_4LAYER-PADS]  71.37,15.24 0 top
J10  NANO_SIM  [NANO_SIM_PP]  76.45,41.91 90 top
J11  [1X12_NO_SILK]  59.94,15.24 90 top
J12  [1X04_NO_SILK]  82.8,15.24 90 top
J13  [USB-C-16P_4LAYER-PADS]  97.28,15.24 0 top
J14  NANO_SIM  [NANO_SIM_PP]  102.36,41.91 90 top
J15  [1X12_NO_SILK]  85.85,15.24 90 top
J16  [1X04_NO_SILK]  108.71,15.24 90 top
J17  [USB-C-16P_4LAYER-PADS]  19.56,100.33 0 top
J18  NANO_SIM  [NANO_SIM_PP]  24.64,127 90 top
J19  [1X12_NO_SILK]  8.13,100.33 90 top
J20  [1X04_NO_SILK]  30.99,100.33 90 top
J21  [USB-C-16P_4LAYER-PADS]  45.47,100.33 0 top
J22  NANO_SIM  [NANO_SIM_PP]  50.55,127 90 top
J23  [1X12_NO_SILK]  34.04,100.33 90 top
J24  [1X04_NO_SILK]  56.9,100.33 90 top
J25  [USB-C-16P_4LAYER-PADS]  71.37,100.33 0 top
J26  NANO_SIM  [NANO_SIM_PP]  76.45,127 90 top
J27  [1X12_NO_SILK]  59.94,100.33 90 top
J28  [1X04_NO_SILK]  82.8,100.33 90 top
J29  [USB-C-16P_4LAYER-PADS]  97.28,100.33 0 top
J30  NANO_SIM  [NANO_SIM_PP]  102.36,127 90 top
J31  [1X12_NO_SILK]  85.85,100.33 90 top
J32  [1X04_NO_SILK]  108.71,100.33 90 top
LOGO1  SFE_LOGO_NAME_FLAME.1_INCH  [SFE_LOGO_NAME_FLAME_.1]  19.56,71.12 0 bottom
LOGO2  OSHW-LOGOM  [OSHW-LOGO-M]  19.56,88.27 0 bottom
LOGO3  SFE_LOGO_NAME_FLAME.1_INCH  [SFE_LOGO_NAME_FLAME_.1]  45.47,71.12 0 bottom
LOGO4  OSHW-LOGOM  [OSHW-LOGO-M]  45.47,88.27 0 bottom
LOGO5  SFE_LOGO_NAME_FLAME.1_INCH  [SFE_LOGO_NAME_FLAME_.1]  71.37,71.12 0 bottom
LOGO6  OSHW-LOGOM  [OSHW-LOGO-M]  71.37,88.27 0 bottom
LOGO7  SFE_LOGO_NAME_FLAME.1_INCH  [SFE_LOGO_NAME_FLAME_.1]  97.28,71.12 0 bottom
LOGO8  OSHW-LOGOM  [OSHW-LOGO-M]  97.28,88.27 0 bottom
LOGO9  SFE_LOGO_NAME_FLAME.1_INCH  [SFE_LOGO_NAME_FLAME_.1]  19.56,156.21 0 bottom
LOGO10  OSHW-LOGOM  [OSHW-LOGO-M]  19.56,173.36 0 bottom
LOGO11  SFE_LOGO_NAME_FLAME.1_INCH  [SFE_LOGO_NAME_FLAME_.1]  45.47,156.21 0 bottom
LOGO12  OSHW-LOGOM  [OSHW-LOGO-M]  45.47,173.36 0 bottom
LOGO13  SFE_LOGO_NAME_FLAME.1_INCH  [SFE_LOGO_NAME_FLAME_.1]  71.37,156.21 0 bottom
LOGO14  OSHW-LOGOM  [OSHW-LOGO-M]  71.37,173.36 0 bottom
LOGO15  SFE_LOGO_NAME_FLAME.1_INCH  [SFE_LOGO_NAME_FLAME_.1]  97.28,156.21 0 bottom
LOGO16  OSHW-LOGOM  [OSHW-LOGO-M]  97.28,173.36 0 bottom
ON_BTN  MOMENTARY-SWITCH-SPST-SMD-4.6X2.8MM  [TACTILE_SWITCH_SMD_4.6X2.8MM]  11.94,48.9 90 top
ON_BTN1  MOMENTARY-SWITCH-SPST-SMD-4.6X2.8MM  [TACTILE_SWITCH_SMD_4.6X2.8MM]  37.85,48.9 90 top
ON_BTN2  MOMENTARY-SWITCH-SPST-SMD-4.6X2.8MM  [TACTILE_SWITCH_SMD_4.6X2.8MM]  63.75,48.9 90 top
ON_BTN3  MOMENTARY-SWITCH-SPST-SMD-4.6X2.8MM  [TACTILE_SWITCH_SMD_4.6X2.8MM]  89.66,48.9 90 top
ON_BTN4  MOMENTARY-SWITCH-SPST-SMD-4.6X2.8MM  [TACTILE_SWITCH_SMD_4.6X2.8MM]  11.94,133.99 90 top
ON_BTN5  MOMENTARY-SWITCH-SPST-SMD-4.6X2.8MM  [TACTILE_SWITCH_SMD_4.6X2.8MM]  37.85,133.99 90 top
ON_BTN6  MOMENTARY-SWITCH-SPST-SMD-4.6X2.8MM  [TACTILE_SWITCH_SMD_4.6X2.8MM]  63.75,133.99 90 top
ON_BTN7  MOMENTARY-SWITCH-SPST-SMD-4.6X2.8MM  [TACTILE_SWITCH_SMD_4.6X2.8MM]  89.66,133.99 90 top
ON_LED  JUMPER-SMT_2_NC_TRACE_SILK  [SMT-JUMPER_2_NC_TRACE_SILK]  20.19,31.75 180 bottom
ON_LED1  JUMPER-SMT_2_NC_TRACE_SILK  [SMT-JUMPER_2_NC_TRACE_SILK]  46.1,31.75 180 bottom
ON_LED2  JUMPER-SMT_2_NC_TRACE_SILK  [SMT-JUMPER_2_NC_TRACE_SILK]  72.01,31.75 180 bottom
ON_LED3  JUMPER-SMT_2_NC_TRACE_SILK  [SMT-JUMPER_2_NC_TRACE_SILK]  97.92,31.75 180 bottom
ON_LED4  JUMPER-SMT_2_NC_TRACE_SILK  [SMT-JUMPER_2_NC_TRACE_SILK]  20.19,116.84 180 bottom
ON_LED5  JUMPER-SMT_2_NC_TRACE_SILK  [SMT-JUMPER_2_NC_TRACE_SILK]  46.1,116.84 180 bottom
ON_LED6  JUMPER-SMT_2_NC_TRACE_SILK  [SMT-JUMPER_2_NC_TRACE_SILK]  72.01,116.84 180 bottom
ON_LED7  JUMPER-SMT_2_NC_TRACE_SILK  [SMT-JUMPER_2_NC_TRACE_SILK]  97.92,116.84 180 bottom
PWR_LED  JUMPER-SMT_2_NC_TRACE_SILK  [SMT-JUMPER_2_NC_TRACE_SILK]  20.19,34.92 180 bottom
PWR_LED1  JUMPER-SMT_2_NC_TRACE_SILK  [SMT-JUMPER_2_NC_TRACE_SILK]  46.1,34.92 180 bottom
PWR_LED2  JUMPER-SMT_2_NC_TRACE_SILK  [SMT-JUMPER_2_NC_TRACE_SILK]  72.01,34.92 180 bottom
PWR_LED3  JUMPER-SMT_2_NC_TRACE_SILK  [SMT-JUMPER_2_NC_TRACE_SILK]  97.92,34.92 180 bottom
PWR_LED4  JUMPER-SMT_2_NC_TRACE_SILK  [SMT-JUMPER_2_NC_TRACE_SILK]  20.19,120.02 180 bottom
PWR_LED5  JUMPER-SMT_2_NC_TRACE_SILK  [SMT-JUMPER_2_NC_TRACE_SILK]  46.1,120.02 180 bottom
PWR_LED6  JUMPER-SMT_2_NC_TRACE_SILK  [SMT-JUMPER_2_NC_TRACE_SILK]  72.01,120.02 180 bottom
PWR_LED7  JUMPER-SMT_2_NC_TRACE_SILK  [SMT-JUMPER_2_NC_TRACE_SILK]  97.92,120.02 180 bottom
R1  100k  [0603]  14.48,45.09 180 top
R2  100k  [0603]  25.4,26.04 270 top
R3  4.7k  [0603]  14.48,33.66 0 top
R4  220  [0603]  14.48,31.75 0 top
R5  5.1k  [0603]  25.91,11.43 90 top
R6  5.1k  [0603]  13.21,11.43 90 top
R7  100k  [0603]  10.67,45.09 0 top
R8  5.1k  [0603]  51.82,11.43 90 top
R9  5.1k  [0603]  39.12,11.43 90 top
R10  100k  [0603]  40.39,45.09 180 top
R11  100k  [0603]  51.31,26.04 270 top
R12  4.7k  [0603]  40.39,33.66 0 top
R13  220  [0603]  40.39,31.75 0 top
R14  100k  [0603]  36.58,45.09 0 top
R15  5.1k  [0603]  77.72,11.43 90 top
R16  5.1k  [0603]  65.02,11.43 90 top
R17  100k  [0603]  66.29,45.09 180 top
R18  100k  [0603]  77.22,26.04 270 top
R19  4.7k  [0603]  66.29,33.66 0 top
R20  220  [0603]  66.29,31.75 0 top
R21  100k  [0603]  62.48,45.09 0 top
R22  5.1k  [0603]  103.63,11.43 90 top
R23  5.1k  [0603]  90.93,11.43 90 top
R24  100k  [0603]  92.2,45.09 180 top
R25  100k  [0603]  103.12,26.04 270 top
R26  4.7k  [0603]  92.2,33.66 0 top
R27  220  [0603]  92.2,31.75 0 top
R28  100k  [0603]  88.39,45.09 0 top
R29  5.1k  [0603]  25.91,96.52 90 top
R30  5.1k  [0603]  13.21,96.52 90 top
R31  100k  [0603]  14.48,130.18 180 top
R32  100k  [0603]  25.4,111.12 270 top
R33  4.7k  [0603]  14.48,118.75 0 top
R34  220  [0603]  14.48,116.84 0 top
R35  100k  [0603]  10.67,130.18 0 top
R36  5.1k  [0603]  51.82,96.52 90 top
R37  5.1k  [0603]  39.12,96.52 90 top
R38  100k  [0603]  40.39,130.18 180 top
R39  100k  [0603]  51.31,111.12 270 top
R40  4.7k  [0603]  40.39,118.75 0 top
R41  220  [0603]  40.39,116.84 0 top
R42  100k  [0603]  36.58,130.18 0 top
R43  5.1k  [0603]  77.72,96.52 90 top
R44  5.1k  [0603]  65.02,96.52 90 top
R45  100k  [0603]  66.29,130.18 180 top
R46  100k  [0603]  77.22,111.12 270 top
R47  4.7k  [0603]  66.29,118.75 0 top
R48  220  [0603]  66.29,116.84 0 top
R49  100k  [0603]  62.48,130.18 0 top
R50  5.1k  [0603]  103.63,96.52 90 top
R51  5.1k  [0603]  90.93,96.52 90 top
R52  100k  [0603]  92.2,130.18 180 top
R53  100k  [0603]  103.12,111.12 270 top
R54  4.7k  [0603]  92.2,118.75 0 top
R55  220  [0603]  92.2,116.84 0 top
R56  100k  [0603]  88.39,130.18 0 top
RST_BTN  MOMENTARY-SWITCH-SPST-SMD-4.6X2.8MM  [TACTILE_SWITCH_SMD_4.6X2.8MM]  15.75,48.9 90 top
RST_BTN1  MOMENTARY-SWITCH-SPST-SMD-4.6X2.8MM  [TACTILE_SWITCH_SMD_4.6X2.8MM]  41.66,48.9 90 top
RST_BTN2  MOMENTARY-SWITCH-SPST-SMD-4.6X2.8MM  [TACTILE_SWITCH_SMD_4.6X2.8MM]  67.56,48.9 90 top
RST_BTN3  MOMENTARY-SWITCH-SPST-SMD-4.6X2.8MM  [TACTILE_SWITCH_SMD_4.6X2.8MM]  93.47,48.9 90 top
RST_BTN4  MOMENTARY-SWITCH-SPST-SMD-4.6X2.8MM  [TACTILE_SWITCH_SMD_4.6X2.8MM]  15.75,133.99 90 top
RST_BTN5  MOMENTARY-SWITCH-SPST-SMD-4.6X2.8MM  [TACTILE_SWITCH_SMD_4.6X2.8MM]  41.66,133.99 90 top
RST_BTN6  MOMENTARY-SWITCH-SPST-SMD-4.6X2.8MM  [TACTILE_SWITCH_SMD_4.6X2.8MM]  67.56,133.99 90 top
RST_BTN7  MOMENTARY-SWITCH-SPST-SMD-4.6X2.8MM  [TACTILE_SWITCH_SMD_4.6X2.8MM]  93.47,133.99 90 top
SHLD  JUMPER-SMT_2_NC_TRACE_SILK  [SMT-JUMPER_2_NC_TRACE_SILK]  21.97,10.16 180 bottom
SHLD1  JUMPER-SMT_2_NC_TRACE_SILK  [SMT-JUMPER_2_NC_TRACE_SILK]  47.88,10.16 180 bottom
SHLD2  JUMPER-SMT_2_NC_TRACE_SILK  [SMT-JUMPER_2_NC_TRACE_SILK]  73.79,10.16 180 bottom
SHLD3  JUMPER-SMT_2_NC_TRACE_SILK  [SMT-JUMPER_2_NC_TRACE_SILK]  99.7,10.16 180 bottom
SHLD4  JUMPER-SMT_2_NC_TRACE_SILK  [SMT-JUMPER_2_NC_TRACE_SILK]  21.97,95.25 180 bottom
SHLD5  JUMPER-SMT_2_NC_TRACE_SILK  [SMT-JUMPER_2_NC_TRACE_SILK]  47.88,95.25 180 bottom
SHLD6  JUMPER-SMT_2_NC_TRACE_SILK  [SMT-JUMPER_2_NC_TRACE_SILK]  73.79,95.25 180 bottom
SHLD7  JUMPER-SMT_2_NC_TRACE_SILK  [SMT-JUMPER_2_NC_TRACE_SILK]  99.7,95.25 180 bottom
TP1  TEST-POINT3X5  [PAD.03X.05]  18.29,53.34 180 bottom
TP2  TEST-POINT3X5  [PAD.03X.05]  20.83,53.34 180 bottom
TP3  TEST-POINT3X5  [PAD.03X.05]  20.83,55.88 180 bottom
TP4  TEST-POINT3X5  [PAD.03X.05]  18.29,55.88 180 bottom
TP5  TEST-POINT3X5  [PAD.03X.05]  11.94,71.12 180 bottom
TP6  TEST-POINT3X5  [PAD.03X.05]  9.4,71.12 180 bottom
TP7  TEST-POINT3X5  [PAD.03X.05]  11.94,68.58 180 bottom
TP8  TEST-POINT3X5  [PAD.03X.05]  9.4,68.58 180 bottom
TP9  TEST-POINT3X5  [PAD.03X.05]  11.94,73.66 180 bottom
TP10  TEST-POINT3X5  [PAD.03X.05]  9.4,73.66 180 bottom
TP11  TEST-POINT3X5  [PAD.03X.05]  10.67,55.88 0 bottom
TP12  TEST-POINT3X5  [PAD.03X.05]  13.21,53.34 0 bottom
TP13  TEST-POINT3X5  [PAD.03X.05]  10.67,53.34 0 bottom
TP14  TEST-POINT3X5  [PAD.03X.05]  13.21,55.88 0 bottom
TP15  TEST-POINT3X5  [PAD.03X.05]  10.67,50.8 0 bottom
TP16  TEST-POINT3X5  [PAD.03X.05]  13.21,50.8 0 bottom
TP17  TEST-POINT3X5  [PAD.03X.05]  18.29,50.8 0 bottom
TP18  TEST-POINT3X5  [PAD.03X.05]  44.2,53.34 180 bottom
TP19  TEST-POINT3X5  [PAD.03X.05]  46.74,53.34 180 bottom
TP20  TEST-POINT3X5  [PAD.03X.05]  46.74,55.88 180 bottom
TP21  TEST-POINT3X5  [PAD.03X.05]  44.2,55.88 180 bottom
TP22  TEST-POINT3X5  [PAD.03X.05]  37.85,71.12 180 bottom
TP23  TEST-POINT3X5  [PAD.03X.05]  35.31,71.12 180 bottom
TP24  TEST-POINT3X5  [PAD.03X.05]  37.85,68.58 180 bottom
TP25  TEST-POINT3X5  [PAD.03X.05]  35.31,68.58 180 bottom
TP26  TEST-POINT3X5  [PAD.03X.05]  37.85,73.66 180 bottom
TP27  TEST-POINT3X5  [PAD.03X.05]  35.31,73.66 180 bottom
TP28  TEST-POINT3X5  [PAD.03X.05]  36.58,55.88 0 bottom
TP29  TEST-POINT3X5  [PAD.03X.05]  39.12,53.34 0 bottom
TP30  TEST-POINT3X5  [PAD.03X.05]  36.58,53.34 0 bottom
TP31  TEST-POINT3X5  [PAD.03X.05]  39.12,55.88 0 bottom
TP32  TEST-POINT3X5  [PAD.03X.05]  36.58,50.8 0 bottom
TP33  TEST-POINT3X5  [PAD.03X.05]  39.12,50.8 0 bottom
TP34  TEST-POINT3X5  [PAD.03X.05]  44.2,50.8 0 bottom
TP35  TEST-POINT3X5  [PAD.03X.05]  70.1,53.34 180 bottom
TP36  TEST-POINT3X5  [PAD.03X.05]  72.64,53.34 180 bottom
TP37  TEST-POINT3X5  [PAD.03X.05]  72.64,55.88 180 bottom
TP38  TEST-POINT3X5  [PAD.03X.05]  70.1,55.88 180 bottom
TP39  TEST-POINT3X5  [PAD.03X.05]  63.75,71.12 180 bottom
TP40  TEST-POINT3X5  [PAD.03X.05]  61.21,71.12 180 bottom
TP41  TEST-POINT3X5  [PAD.03X.05]  63.75,68.58 180 bottom
TP42  TEST-POINT3X5  [PAD.03X.05]  61.21,68.58 180 bottom
TP43  TEST-POINT3X5  [PAD.03X.05]  63.75,73.66 180 bottom
TP44  TEST-POINT3X5  [PAD.03X.05]  61.21,73.66 180 bottom
TP45  TEST-POINT3X5  [PAD.03X.05]  62.48,55.88 0 bottom
TP46  TEST-POINT3X5  [PAD.03X.05]  65.02,53.34 0 bottom
TP47  TEST-POINT3X5  [PAD.03X.05]  62.48,53.34 0 bottom
TP48  TEST-POINT3X5  [PAD.03X.05]  65.02,55.88 0 bottom
TP49  TEST-POINT3X5  [PAD.03X.05]  62.48,50.8 0 bottom
TP50  TEST-POINT3X5  [PAD.03X.05]  65.02,50.8 0 bottom
TP51  TEST-POINT3X5  [PAD.03X.05]  70.1,50.8 0 bottom
TP52  TEST-POINT3X5  [PAD.03X.05]  96.01,53.34 180 bottom
TP53  TEST-POINT3X5  [PAD.03X.05]  98.55,53.34 180 bottom
TP54  TEST-POINT3X5  [PAD.03X.05]  98.55,55.88 180 bottom
TP55  TEST-POINT3X5  [PAD.03X.05]  96.01,55.88 180 bottom
TP56  TEST-POINT3X5  [PAD.03X.05]  89.66,71.12 180 bottom
TP57  TEST-POINT3X5  [PAD.03X.05]  87.12,71.12 180 bottom
TP58  TEST-POINT3X5  [PAD.03X.05]  89.66,68.58 180 bottom
TP59  TEST-POINT3X5  [PAD.03X.05]  87.12,68.58 180 bottom
TP60  TEST-POINT3X5  [PAD.03X.05]  89.66,73.66 180 bottom
TP61  TEST-POINT3X5  [PAD.03X.05]  87.12,73.66 180 bottom
TP62  TEST-POINT3X5  [PAD.03X.05]  88.39,55.88 0 bottom
TP63  TEST-POINT3X5  [PAD.03X.05]  90.93,53.34 0 bottom
TP64  TEST-POINT3X5  [PAD.03X.05]  88.39,53.34 0 bottom
TP65  TEST-POINT3X5  [PAD.03X.05]  90.93,55.88 0 bottom
TP66  TEST-POINT3X5  [PAD.03X.05]  88.39,50.8 0 bottom
TP67  TEST-POINT3X5  [PAD.03X.05]  90.93,50.8 0 bottom
TP68  TEST-POINT3X5  [PAD.03X.05]  96.01,50.8 0 bottom
TP69  TEST-POINT3X5  [PAD.03X.05]  18.29,138.43 180 bottom
TP70  TEST-POINT3X5  [PAD.03X.05]  20.83,138.43 180 bottom
TP71  TEST-POINT3X5  [PAD.03X.05]  20.83,140.97 180 bottom
TP72  TEST-POINT3X5  [PAD.03X.05]  18.29,140.97 180 bottom
TP73  TEST-POINT3X5  [PAD.03X.05]  11.94,156.21 180 bottom
TP74  TEST-POINT3X5  [PAD.03X.05]  9.4,156.21 180 bottom
TP75  TEST-POINT3X5  [PAD.03X.05]  11.94,153.67 180 bottom
TP76  TEST-POINT3X5  [PAD.03X.05]  9.4,153.67 180 bottom
TP77  TEST-POINT3X5  [PAD.03X.05]  11.94,158.75 180 bottom
TP78  TEST-POINT3X5  [PAD.03X.05]  9.4,158.75 180 bottom
TP79  TEST-POINT3X5  [PAD.03X.05]  10.67,140.97 0 bottom
TP80  TEST-POINT3X5  [PAD.03X.05]  13.21,138.43 0 bottom
TP81  TEST-POINT3X5  [PAD.03X.05]  10.67,138.43 0 bottom
TP82  TEST-POINT3X5  [PAD.03X.05]  13.21,140.97 0 bottom
TP83  TEST-POINT3X5  [PAD.03X.05]  10.67,135.89 0 bottom
TP84  TEST-POINT3X5  [PAD.03X.05]  13.21,135.89 0 bottom
TP85  TEST-POINT3X5  [PAD.03X.05]  18.29,135.89 0 bottom
TP86  TEST-POINT3X5  [PAD.03X.05]  44.2,138.43 180 bottom
TP87  TEST-POINT3X5  [PAD.03X.05]  46.74,138.43 180 bottom
TP88  TEST-POINT3X5  [PAD.03X.05]  46.74,140.97 180 bottom
TP89  TEST-POINT3X5  [PAD.03X.05]  44.2,140.97 180 bottom
TP90  TEST-POINT3X5  [PAD.03X.05]  37.85,156.21 180 bottom
TP91  TEST-POINT3X5  [PAD.03X.05]  35.31,156.21 180 bottom
TP92  TEST-POINT3X5  [PAD.03X.05]  37.85,153.67 180 bottom
TP93  TEST-POINT3X5  [PAD.03X.05]  35.31,153.67 180 bottom
TP94  TEST-POINT3X5  [PAD.03X.05]  37.85,158.75 180 bottom
TP95  TEST-POINT3X5  [PAD.03X.05]  35.31,158.75 180 bottom
TP96  TEST-POINT3X5  [PAD.03X.05]  36.58,140.97 0 bottom
TP97  TEST-POINT3X5  [PAD.03X.05]  39.12,138.43 0 bottom
TP98  TEST-POINT3X5  [PAD.03X.05]  36.58,138.43 0 bottom
TP99  TEST-POINT3X5  [PAD.03X.05]  39.12,140.97 0 bottom
TP100  TEST-POINT3X5  [PAD.03X.05]  36.58,135.89 0 bottom
TP101  TEST-POINT3X5  [PAD.03X.05]  39.12,135.89 0 bottom
TP102  TEST-POINT3X5  [PAD.03X.05]  44.2,135.89 0 bottom
TP103  TEST-POINT3X5  [PAD.03X.05]  70.1,138.43 180 bottom
TP104  TEST-POINT3X5  [PAD.03X.05]  72.64,138.43 180 bottom
TP105  TEST-POINT3X5  [PAD.03X.05]  72.64,140.97 180 bottom
TP106  TEST-POINT3X5  [PAD.03X.05]  70.1,140.97 180 bottom
TP107  TEST-POINT3X5  [PAD.03X.05]  63.75,156.21 180 bottom
TP108  TEST-POINT3X5  [PAD.03X.05]  61.21,156.21 180 bottom
TP109  TEST-POINT3X5  [PAD.03X.05]  63.75,153.67 180 bottom
TP110  TEST-POINT3X5  [PAD.03X.05]  61.21,153.67 180 bottom
TP111  TEST-POINT3X5  [PAD.03X.05]  63.75,158.75 180 bottom
TP112  TEST-POINT3X5  [PAD.03X.05]  61.21,158.75 180 bottom
TP113  TEST-POINT3X5  [PAD.03X.05]  62.48,140.97 0 bottom
TP114  TEST-POINT3X5  [PAD.03X.05]  65.02,138.43 0 bottom
TP115  TEST-POINT3X5  [PAD.03X.05]  62.48,138.43 0 bottom
TP116  TEST-POINT3X5  [PAD.03X.05]  65.02,140.97 0 bottom
TP117  TEST-POINT3X5  [PAD.03X.05]  62.48,135.89 0 bottom
TP118  TEST-POINT3X5  [PAD.03X.05]  65.02,135.89 0 bottom
TP119  TEST-POINT3X5  [PAD.03X.05]  70.1,135.89 0 bottom
TP120  TEST-POINT3X5  [PAD.03X.05]  96.01,138.43 180 bottom
TP121  TEST-POINT3X5  [PAD.03X.05]  98.55,138.43 180 bottom
TP122  TEST-POINT3X5  [PAD.03X.05]  98.55,140.97 180 bottom
TP123  TEST-POINT3X5  [PAD.03X.05]  96.01,140.97 180 bottom
TP124  TEST-POINT3X5  [PAD.03X.05]  89.66,156.21 180 bottom
TP125  TEST-POINT3X5  [PAD.03X.05]  87.12,156.21 180 bottom
TP126  TEST-POINT3X5  [PAD.03X.05]  89.66,153.67 180 bottom
TP127  TEST-POINT3X5  [PAD.03X.05]  87.12,153.67 180 bottom
TP128  TEST-POINT3X5  [PAD.03X.05]  89.66,158.75 180 bottom
TP129  TEST-POINT3X5  [PAD.03X.05]  87.12,158.75 180 bottom
TP130  TEST-POINT3X5  [PAD.03X.05]  88.39,140.97 0 bottom
TP131  TEST-POINT3X5  [PAD.03X.05]  90.93,138.43 0 bottom
TP132  TEST-POINT3X5  [PAD.03X.05]  88.39,138.43 0 bottom
TP133  TEST-POINT3X5  [PAD.03X.05]  90.93,140.97 0 bottom
TP134  TEST-POINT3X5  [PAD.03X.05]  88.39,135.89 0 bottom
TP135  TEST-POINT3X5  [PAD.03X.05]  90.93,135.89 0 bottom
TP136  TEST-POINT3X5  [PAD.03X.05]  96.01,135.89 0 bottom
U1  LARA-R6401  [LARA-LGA]  19.56,66.04 270 top
U2  AP7361C-33  [UDFN-8]  28.07,26.04 90 top
U3  LARA-R6401  [LARA-LGA]  45.47,66.04 270 top
U4  AP7361C-33  [UDFN-8]  53.97,26.04 90 top
U5  LARA-R6401  [LARA-LGA]  71.37,66.04 270 top
U6  AP7361C-33  [UDFN-8]  79.88,26.04 90 top
U7  LARA-R6401  [LARA-LGA]  97.28,66.04 270 top
U8  AP7361C-33  [UDFN-8]  105.79,26.04 90 top
U9  LARA-R6401  [LARA-LGA]  19.56,151.13 270 top
U10  AP7361C-33  [UDFN-8]  28.07,111.12 90 top
U11  LARA-R6401  [LARA-LGA]  45.47,151.13 270 top
U12  AP7361C-33  [UDFN-8]  53.97,111.12 90 top
U13  LARA-R6401  [LARA-LGA]  71.37,151.13 270 top
U14  AP7361C-33  [UDFN-8]  79.88,111.12 90 top
U15  LARA-R6401  [LARA-LGA]  97.28,151.13 270 top
U16  AP7361C-33  [UDFN-8]  105.79,111.12 90 top
U$1  [LTE_STICK0]  19.56,89.79 0 top
U$2  [SFE_LOGO_FLAME_.2]  19.56,83.82 0 top
U$3  [#_3V3#0]  8.38,27.94 0 top
U$4  [#_GND#0]  8.38,25.4 0 top
U$5  [#_GND#0]  30.73,15.24 0 bottom
U$6  [#SHLD#0]  21.08,10.16 0 bottom
U$7  [#GND_#0]  30.73,15.24 0 top
U$8  [#GND_#0]  8.38,25.4 0 bottom
U$9  [#3V3_#0]  8.38,27.94 0 bottom
U$10  [#DTR#0]  10.03,66.04 0 bottom
U$11  [#VIN_#0]  30.73,17.78 0 top
U$12  [#3V3_#0]  30.73,20.32 0 top
U$13  [#1V8_#0]  30.73,22.86 0 top
U$14  [#_1V8#0]  30.73,22.86 0 bottom
U$15  [#_3V3#0]  30.73,20.32 0 bottom
U$16  [#_VIN#0]  30.73,17.78 0 bottom
U$17  [#_CTS#0]  8.38,35.56 0 top
U$18  [#_RTS#0]  8.38,38.1 0 top
U$19  [#RXD_#0]  8.38,30.48 0 bottom
U$20  [#TXD_#0]  8.38,33.02 0 bottom
U$21  [#_CLK#0]  8.38,20.32 0 top
U$22  [#_WA#0]  8.38,15.24 0 top
U$23  [#RXA_#0]  8.38,22.86 0 bottom
U$24  [#TXA_#0]  8.38,17.78 0 bottom
U$25  [LTE_STICK0]  19.56,68.58 0 bottom
U$26  [SIM_CARD0]  25.91,41.27 0 bottom
U$27  [VOLTAGE_LEVEL0]  19.56,63.5 0 bottom
U$28  [PWR0]  19.3,33.66 0 top
U$29  [ANT10]  27.43,85.72 0 top
U$30  [TEST_POINTS0]  22.1,60.96 0 bottom
U$31  [LARA#R60]  19.56,88.27 0 top
U$32  [#_RXA#0]  8.38,22.86 0 top
U$33  [#_#RST##0]  8.38,40.64 0 top
U$34  [PTH_PADS0]  22.1,58.42 0 bottom
U$35  [LARA#R60]  19.56,66.67 0 bottom
U$36  [ANT10]  27.94,85.72 0 bottom
U$37  [ON0]  10.16,52.07 0 top
U$38  [##PWR_ON#_#0]  8.38,43.18 0 bottom
U$39  [ON0]  19.3,31.75 0 top
U$40  [#_TXA#0]  8.38,17.78 0 top
U$41  [#_TXD#0]  8.38,33.02 0 top
U$42  [#_RXD#0]  8.38,30.48 0 top
U$43  [#CLK_#0]  8.38,20.32 0 bottom
U$44  [#WA_#0]  8.38,15.24 0 bottom
U$45  [#RTS_#0]  8.38,38.1 0 bottom
U$46  [#CTS_#0]  8.38,35.56 0 bottom
U$47  [##RESET#_#0]  8.38,40.64 0 bottom
U$48  [UART0]  14.61,34.42 90 bottom
U$49  [I2S0]  14.61,19.18 90 bottom
U$50  [1#8V0]  14.48,60.96 0 bottom
U$51  [ORIENTATION0]  25.91,40 0 bottom
U$52  [RST0]  15.88,52.07 0 top
U$53  [#ON_LED#0]  21.08,31.75 0 bottom
U$54  [3#3V0]  14.48,58.42 0 bottom
U$55  [LTE_STICK0]  45.47,89.79 0 top
U$56  [UART20]  10.67,75.56 0 bottom
U$57  [GPIO0]  11.94,48.9 0 bottom
U$58  [I2C0]  19.56,48.9 0 bottom
U$59  [#_#ON##0]  8.38,43.18 0 top
U$60  [#PWR_LED#0]  21.08,34.92 0 bottom
U$61  [ANT20]  11.56,85.72 0 bottom
U$62  [ANT20]  11.3,85.72 0 top
U$63  [#_3V3#0]  34.29,27.94 0 top
U$64  [#_GND#0]  34.29,25.4 0 top
U$65  [#_GND#0]  56.64,15.24 0 bottom
U$66  [#GND_#0]  56.64,15.24 0 top
U$67  [#GND_#0]  34.29,25.4 0 bottom
U$68  [#3V3_#0]  34.29,27.94 0 bottom
U$69  [#VIN_#0]  56.64,17.78 0 top
U$70  [#3V3_#0]  56.64,20.32 0 top
U$71  [#1V8_#0]  56.64,22.86 0 top
U$72  [#_1V8#0]  56.64,22.86 0 bottom
U$73  [#_3V3#0]  56.64,20.32 0 bottom
U$74  [#_VIN#0]  56.64,17.78 0 bottom
U$75  [#_CTS#0]  34.29,35.56 0 top
U$76  [#_RTS#0]  34.29,38.1 0 top
U$77  [#_CLK#0]  34.29,20.32 0 top
U$78  [#_WA#0]  34.29,15.24 0 top
U$79  [LTE_STICK0]  45.47,68.58 0 bottom
U$80  [#SHLD#0]  46.99,10.16 0 bottom
U$81  [#DTR#0]  35.94,66.04 0 bottom
U$82  [PWR0]  45.21,33.66 0 top
U$83  [#_#RST##0]  34.29,40.64 0 top
U$84  [SFE_LOGO_FLAME_.2]  45.47,83.82 0 top
U$85  [LARA#R60]  45.47,88.27 0 top
U$86  [LARA#R60]  45.47,66.67 0 bottom
U$87  [#RTS_#0]  34.29,38.1 0 bottom
U$88  [#CTS_#0]  34.29,35.56 0 bottom
U$89  [##RESET#_#0]  34.29,40.64 0 bottom
U$90  [##PWR_ON#_#0]  34.29,43.18 0 bottom
U$91  [#_RXA#0]  34.29,22.86 0 top
U$92  [#_TXA#0]  34.29,17.78 0 top
U$93  [#_TXD#0]  34.29,33.02 0 top
U$94  [#_RXD#0]  34.29,30.48 0 top
U$95  [#RXD_#0]  34.29,30.48 0 bottom
U$96  [#TXD_#0]  34.29,33.02 0 bottom
U$97  [#RXA_#0]  34.29,22.86 0 bottom
U$98  [#TXA_#0]  34.29,17.78 0 bottom
U$99  [#CLK_#0]  34.29,20.32 0 bottom
U$100  [#WA_#0]  34.29,15.24 0 bottom
U$101  [UART0]  40.51,34.42 90 bottom
U$102  [I2S0]  40.51,19.18 90 bottom
U$103  [ORIENTATION0]  51.82,40 0 bottom
U$104  [RST0]  41.78,52.07 0 top
U$105  [SIM_CARD0]  51.82,41.27 0 bottom
U$106  [VOLTAGE_LEVEL0]  45.47,63.5 0 bottom
U$107  [TEST_POINTS0]  48.01,60.96 0 bottom
U$108  [PTH_PADS0]  48.01,58.42 0 bottom
U$109  [1#8V0]  40.39,60.96 0 bottom
U$110  [3#3V0]  40.39,58.42 0 bottom
U$111  [UART20]  36.58,75.56 0 bottom
U$112  [GPIO0]  37.85,48.9 0 bottom
U$113  [I2C0]  45.47,48.9 0 bottom
U$114  [#_#ON##0]  34.29,43.18 0 top
U$115  [ON0]  45.21,31.75 0 top
U$116  [ON0]  36.07,52.07 0 top
U$117  [#ON_LED#0]  46.99,31.75 0 bottom
U$118  [#PWR_LED#0]  46.99,34.92 0 bottom
U$119  [ANT10]  53.34,85.72 0 top
U$120  [ANT10]  53.85,85.72 0 bottom
U$121  [ANT20]  37.46,85.72 0 bottom
U$122  [ANT20]  37.21,85.72 0 top
U$123  [LTE_STICK0]  71.37,89.79 0 top
U$124  [#_3V3#0]  60.2,27.94 0 top
U$125  [#_GND#0]  60.2,25.4 0 top
U$126  [#_GND#0]  82.55,15.24 0 bottom
U$127  [#GND_#0]  82.55,15.24 0 top
U$128  [#GND_#0]  60.2,25.4 0 bottom
U$129  [#3V3_#0]  60.2,27.94 0 bottom
U$130  [#VIN_#0]  82.55,17.78 0 top
U$131  [#3V3_#0]  82.55,20.32 0 top
U$132  [#1V8_#0]  82.55,22.86 0 top
U$133  [#_1V8#0]  82.55,22.86 0 bottom
U$134  [#_3V3#0]  82.55,20.32 0 bottom
U$135  [#_VIN#0]  82.55,17.78 0 bottom
U$136  [#_CTS#0]  60.2,35.56 0 top
U$137  [#_RTS#0]  60.2,38.1 0 top
U$138  [#_CLK#0]  60.2,20.32 0 top
U$139  [#_WA#0]  60.2,15.24 0 top
U$140  [LTE_STICK0]  71.37,68.58 0 bottom
U$141  [#SHLD#0]  72.9,10.16 0 bottom
U$142  [#DTR#0]  61.85,66.04 0 bottom
U$143  [PWR0]  71.12,33.66 0 top
U$144  [#_#RST##0]  60.2,40.64 0 top
U$145  [SFE_LOGO_FLAME_.2]  71.37,83.82 0 top
U$146  [LARA#R60]  71.37,88.27 0 top
U$147  [LARA#R60]  71.37,66.67 0 bottom
U$148  [#RTS_#0]  60.2,38.1 0 bottom
U$149  [#CTS_#0]  60.2,35.56 0 bottom
U$150  [##RESET#_#0]  60.2,40.64 0 bottom
U$151  [##PWR_ON#_#0]  60.2,43.18 0 bottom
U$152  [#_RXA#0]  60.2,22.86 0 top
U$153  [#_TXA#0]  60.2,17.78 0 top
U$154  [#_TXD#0]  60.2,33.02 0 top
U$155  [#_RXD#0]  60.2,30.48 0 top
U$156  [#RXD_#0]  60.2,30.48 0 bottom
U$157  [#TXD_#0]  60.2,33.02 0 bottom
U$158  [#RXA_#0]  60.2,22.86 0 bottom
U$159  [#TXA_#0]  60.2,17.78 0 bottom
U$160  [#CLK_#0]  60.2,20.32 0 bottom
U$161  [#WA_#0]  60.2,15.24 0 bottom
U$162  [UART0]  66.42,34.42 90 bottom
U$163  [I2S0]  66.42,19.18 90 bottom
U$164  [ORIENTATION0]  77.72,40 0 bottom
U$165  [RST0]  67.69,52.07 0 top
U$166  [SIM_CARD0]  77.72,41.27 0 bottom
U$167  [VOLTAGE_LEVEL0]  71.37,63.5 0 bottom
U$168  [TEST_POINTS0]  73.91,60.96 0 bottom
U$169  [PTH_PADS0]  73.91,58.42 0 bottom
U$170  [1#8V0]  66.29,60.96 0 bottom
U$171  [3#3V0]  66.29,58.42 0 bottom
U$172  [UART20]  62.48,75.56 0 bottom
U$173  [GPIO0]  63.75,48.9 0 bottom
U$174  [I2C0]  71.37,48.9 0 bottom
U$175  [#_#ON##0]  60.2,43.18 0 top
U$176  [ON0]  71.12,31.75 0 top
U$177  [ON0]  61.98,52.07 0 top
U$178  [#ON_LED#0]  72.9,31.75 0 bottom
U$179  [#PWR_LED#0]  72.9,34.92 0 bottom
U$180  [ANT10]  79.25,85.72 0 top
U$181  [ANT10]  79.76,85.72 0 bottom
U$182  [ANT20]  63.37,85.72 0 bottom
U$183  [ANT20]  63.12,85.72 0 top
U$184  [LTE_STICK0]  97.28,89.79 0 top
U$185  [#_3V3#0]  86.11,27.94 0 top
U$186  [#_GND#0]  86.11,25.4 0 top
U$187  [#_GND#0]  108.46,15.24 0 bottom
U$188  [#GND_#0]  108.46,15.24 0 top
U$189  [#GND_#0]  86.11,25.4 0 bottom
U$190  [#3V3_#0]  86.11,27.94 0 bottom
U$191  [#VIN_#0]  108.46,17.78 0 top
U$192  [#3V3_#0]  108.46,20.32 0 top
U$193  [#1V8_#0]  108.46,22.86 0 top
U$194  [#_1V8#0]  108.46,22.86 0 bottom
U$195  [#_3V3#0]  108.46,20.32 0 bottom
U$196  [#_VIN#0]  108.46,17.78 0 bottom
U$197  [#_CTS#0]  86.11,35.56 0 top
U$198  [#_RTS#0]  86.11,38.1 0 top
U$199  [#_CLK#0]  86.11,20.32 0 top
U$200  [#_WA#0]  86.11,15.24 0 top
U$201  [LTE_STICK0]  97.28,68.58 0 bottom
U$202  [#SHLD#0]  98.81,10.16 0 bottom
U$203  [#DTR#0]  87.76,66.04 0 bottom
U$204  [PWR0]  97.03,33.66 0 top
U$205  [#_#RST##0]  86.11,40.64 0 top
U$206  [SFE_LOGO_FLAME_.2]  97.28,83.82 0 top
U$207  [LARA#R60]  97.28,88.27 0 top
U$208  [LARA#R60]  97.28,66.67 0 bottom
U$209  [#RTS_#0]  86.11,38.1 0 bottom
U$210  [#CTS_#0]  86.11,35.56 0 bottom
U$211  [##RESET#_#0]  86.11,40.64 0 bottom
U$212  [##PWR_ON#_#0]  86.11,43.18 0 bottom
U$213  [#_RXA#0]  86.11,22.86 0 top
U$214  [#_TXA#0]  86.11,17.78 0 top
U$215  [#_TXD#0]  86.11,33.02 0 top
U$216  [#_RXD#0]  86.11,30.48 0 top
U$217  [#RXD_#0]  86.11,30.48 0 bottom
U$218  [#TXD_#0]  86.11,33.02 0 bottom
U$219  [#RXA_#0]  86.11,22.86 0 bottom
U$220  [#TXA_#0]  86.11,17.78 0 bottom
U$221  [#CLK_#0]  86.11,20.32 0 bottom
U$222  [#WA_#0]  86.11,15.24 0 bottom
U$223  [UART0]  92.33,34.42 90 bottom
U$224  [I2S0]  92.33,19.18 90 bottom
U$225  [ORIENTATION0]  103.63,40 0 bottom
U$226  [RST0]  93.6,52.07 0 top
U$227  [SIM_CARD0]  103.63,41.27 0 bottom
U$228  [VOLTAGE_LEVEL0]  97.28,63.5 0 bottom
U$229  [TEST_POINTS0]  99.82,60.96 0 bottom
U$230  [PTH_PADS0]  99.82,58.42 0 bottom
U$231  [1#8V0]  92.2,60.96 0 bottom
U$232  [3#3V0]  92.2,58.42 0 bottom
U$233  [UART20]  88.39,75.56 0 bottom
U$234  [GPIO0]  89.66,48.9 0 bottom
U$235  [I2C0]  97.28,48.9 0 bottom
U$236  [#_#ON##0]  86.11,43.18 0 top
U$237  [ON0]  97.03,31.75 0 top
U$238  [ON0]  87.88,52.07 0 top
U$239  [#ON_LED#0]  98.81,31.75 0 bottom
U$240  [#PWR_LED#0]  98.81,34.92 0 bottom
U$241  [ANT10]  105.16,85.72 0 top
U$242  [ANT10]  105.66,85.72 0 bottom
U$243  [ANT20]  89.28,85.72 0 bottom
U$244  [ANT20]  89.03,85.72 0 top
U$245  [LTE_STICK0]  19.56,174.88 0 top
U$246  [#_3V3#0]  8.38,113.03 0 top
U$247  [#_GND#0]  8.38,110.49 0 top
U$248  [#_GND#0]  30.73,100.33 0 bottom
U$249  [#GND_#0]  30.73,100.33 0 top
U$250  [#GND_#0]  8.38,110.49 0 bottom
U$251  [#3V3_#0]  8.38,113.03 0 bottom
U$252  [#VIN_#0]  30.73,102.87 0 top
U$253  [#3V3_#0]  30.73,105.41 0 top
U$254  [#1V8_#0]  30.73,107.95 0 top
U$255  [#_1V8#0]  30.73,107.95 0 bottom
U$256  [#_3V3#0]  30.73,105.41 0 bottom
U$257  [#_VIN#0]  30.73,102.87 0 bottom
U$258  [#_CTS#0]  8.38,120.65 0 top
U$259  [#_RTS#0]  8.38,123.19 0 top
U$260  [#_CLK#0]  8.38,105.41 0 top
U$261  [#_WA#0]  8.38,100.33 0 top
U$262  [LTE_STICK0]  19.56,153.67 0 bottom
U$263  [#SHLD#0]  21.08,95.25 0 bottom
U$264  [#DTR#0]  10.03,151.13 0 bottom
U$265  [PWR0]  19.3,118.75 0 top
U$266  [#_#RST##0]  8.38,125.73 0 top
U$267  [SFE_LOGO_FLAME_.2]  19.56,168.91 0 top
U$268  [LARA#R60]  19.56,173.36 0 top
U$269  [LARA#R60]  19.56,151.76 0 bottom
U$270  [#RTS_#0]  8.38,123.19 0 bottom
U$271  [#CTS_#0]  8.38,120.65 0 bottom
U$272  [##RESET#_#0]  8.38,125.73 0 bottom
U$273  [##PWR_ON#_#0]  8.38,128.27 0 bottom
U$274  [#_RXA#0]  8.38,107.95 0 top
U$275  [#_TXA#0]  8.38,102.87 0 top
U$276  [#_TXD#0]  8.38,118.11 0 top
U$277  [#_RXD#0]  8.38,115.57 0 top
U$278  [#RXD_#0]  8.38,115.57 0 bottom
U$279  [#TXD_#0]  8.38,118.11 0 bottom
U$280  [#RXA_#0]  8.38,107.95 0 bottom
U$281  [#TXA_#0]  8.38,102.87 0 bottom
U$282  [#CLK_#0]  8.38,105.41 0 bottom
U$283  [#WA_#0]  8.38,100.33 0 bottom
U$284  [UART0]  14.61,119.51 90 bottom
U$285  [I2S0]  14.61,104.27 90 bottom
U$286  [ORIENTATION0]  25.91,125.09 0 bottom
U$287  [RST0]  15.88,137.16 0 top
U$288  [SIM_CARD0]  25.91,126.36 0 bottom
U$289  [VOLTAGE_LEVEL0]  19.56,148.59 0 bottom
U$290  [TEST_POINTS0]  22.1,146.05 0 bottom
U$291  [PTH_PADS0]  22.1,143.51 0 bottom
U$292  [1#8V0]  14.48,146.05 0 bottom
U$293  [3#3V0]  14.48,143.51 0 bottom
U$294  [UART20]  10.67,160.65 0 bottom
U$295  [GPIO0]  11.94,133.99 0 bottom
U$296  [I2C0]  19.56,133.99 0 bottom
U$297  [#_#ON##0]  8.38,128.27 0 top
U$298  [ON0]  19.3,116.84 0 top
U$299  [ON0]  10.16,137.16 0 top
U$300  [#ON_LED#0]  21.08,116.84 0 bottom
U$301  [#PWR_LED#0]  21.08,120.02 0 bottom
U$302  [ANT10]  27.43,170.81 0 top
U$303  [ANT10]  27.94,170.81 0 bottom
U$304  [ANT20]  11.56,170.81 0 bottom
U$305  [ANT20]  11.3,170.81 0 top
U$306  [LTE_STICK0]  45.47,174.88 0 top
U$307  [#_3V3#0]  34.29,113.03 0 top
U$308  [#_GND#0]  34.29,110.49 0 top
U$309  [#_GND#0]  56.64,100.33 0 bottom
U$310  [#GND_#0]  56.64,100.33 0 top
U$311  [#GND_#0]  34.29,110.49 0 bottom
U$312  [#3V3_#0]  34.29,113.03 0 bottom
U$313  [#VIN_#0]  56.64,102.87 0 top
U$314  [#3V3_#0]  56.64,105.41 0 top
U$315  [#1V8_#0]  56.64,107.95 0 top